# EAGLE board SparkFun_DataLogger_IoT-Panel (EAGLE 9.6.2), part 1 of 4
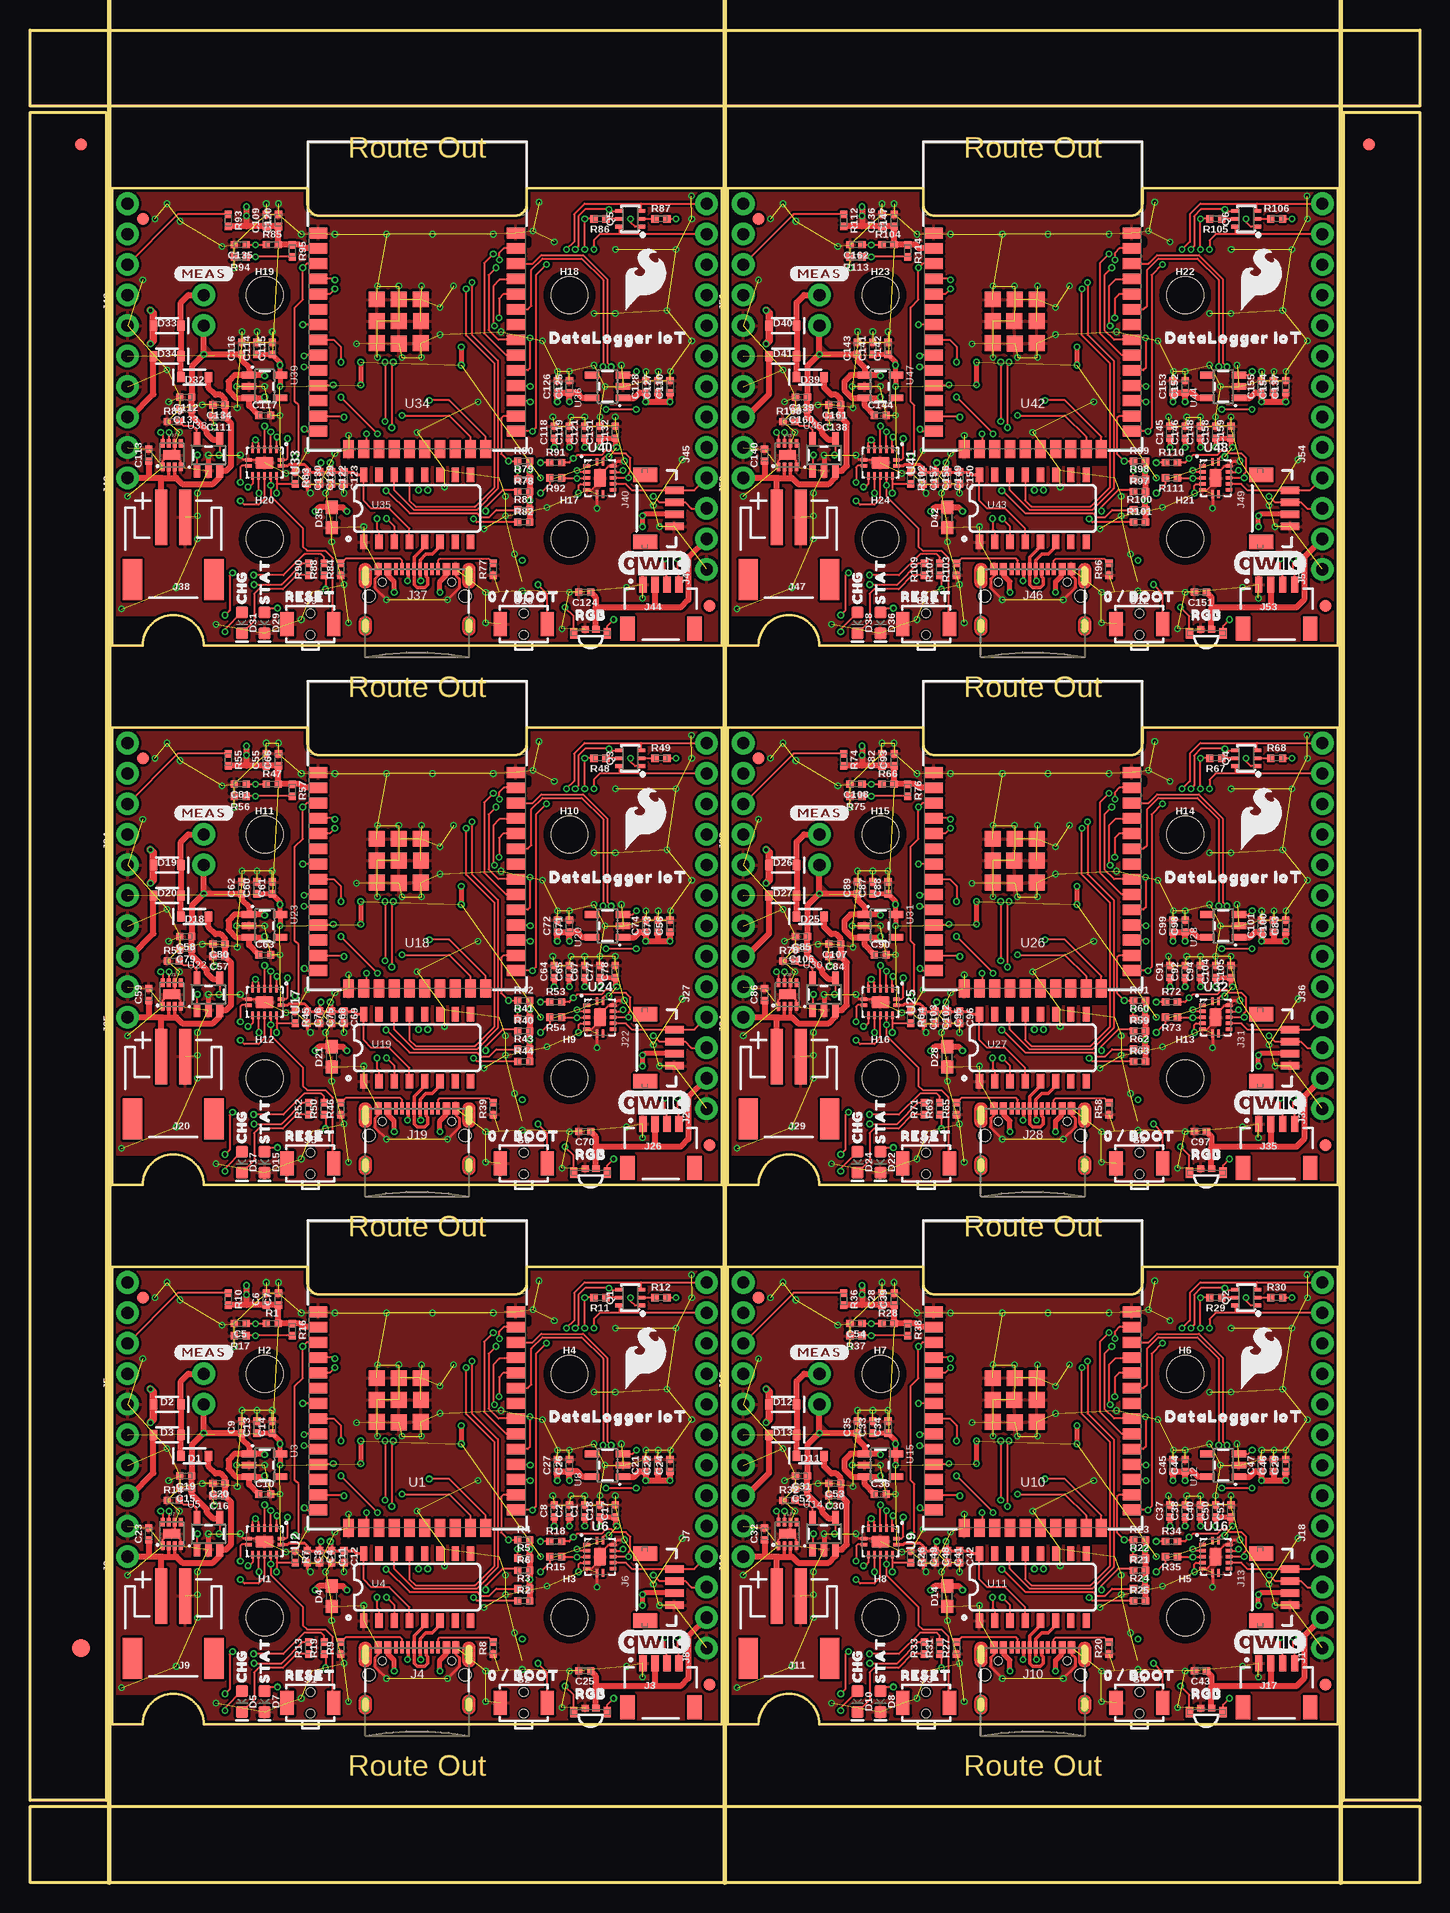
[diagram p0: board, top side]
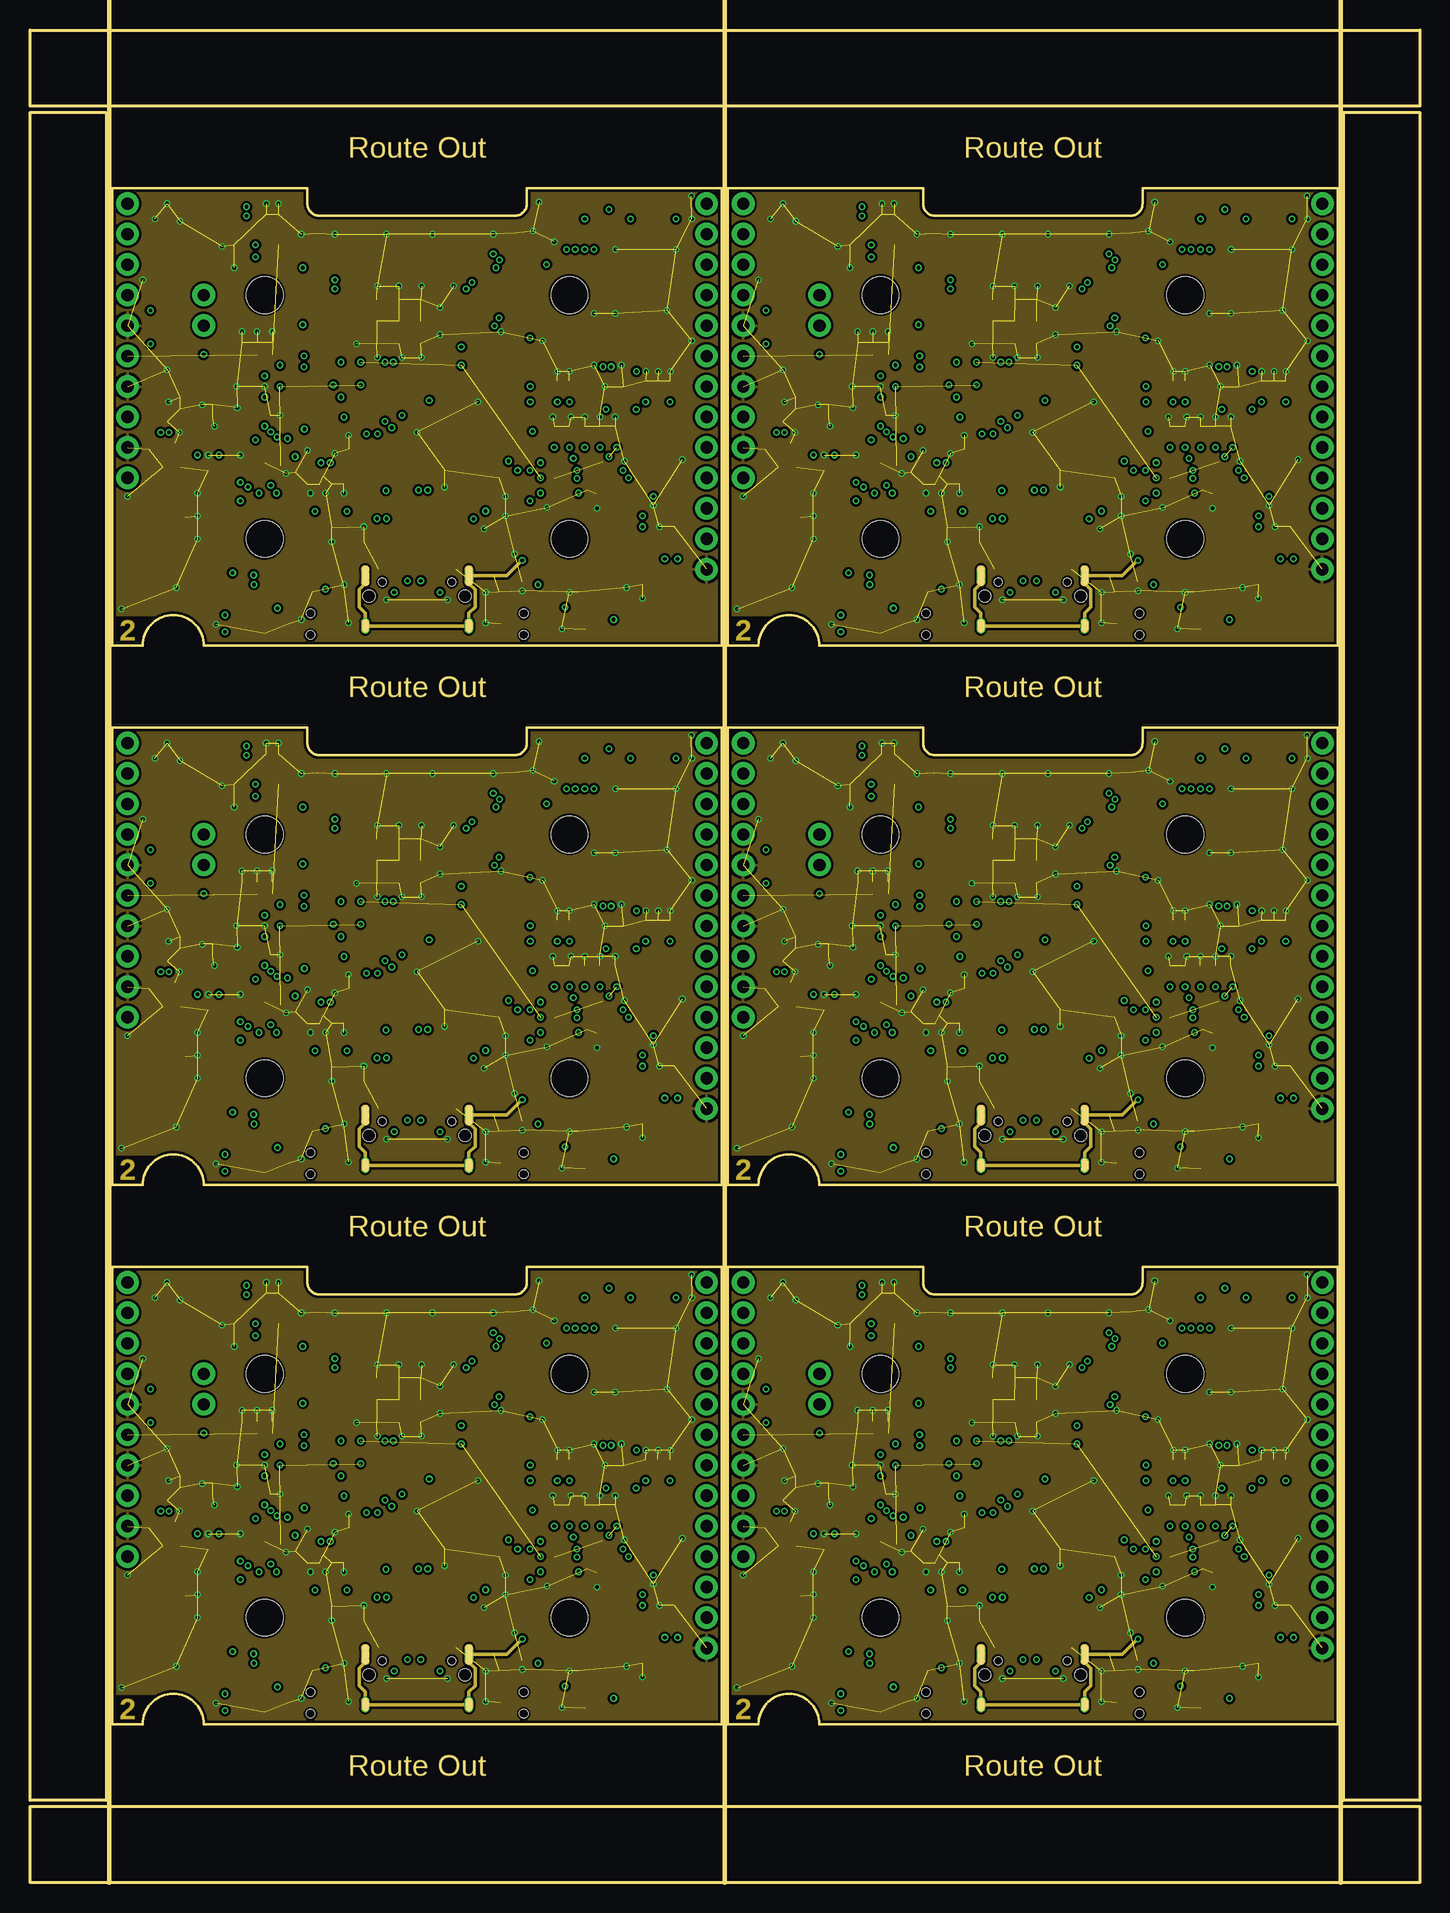
[diagram p1: board, inner layer Route2]
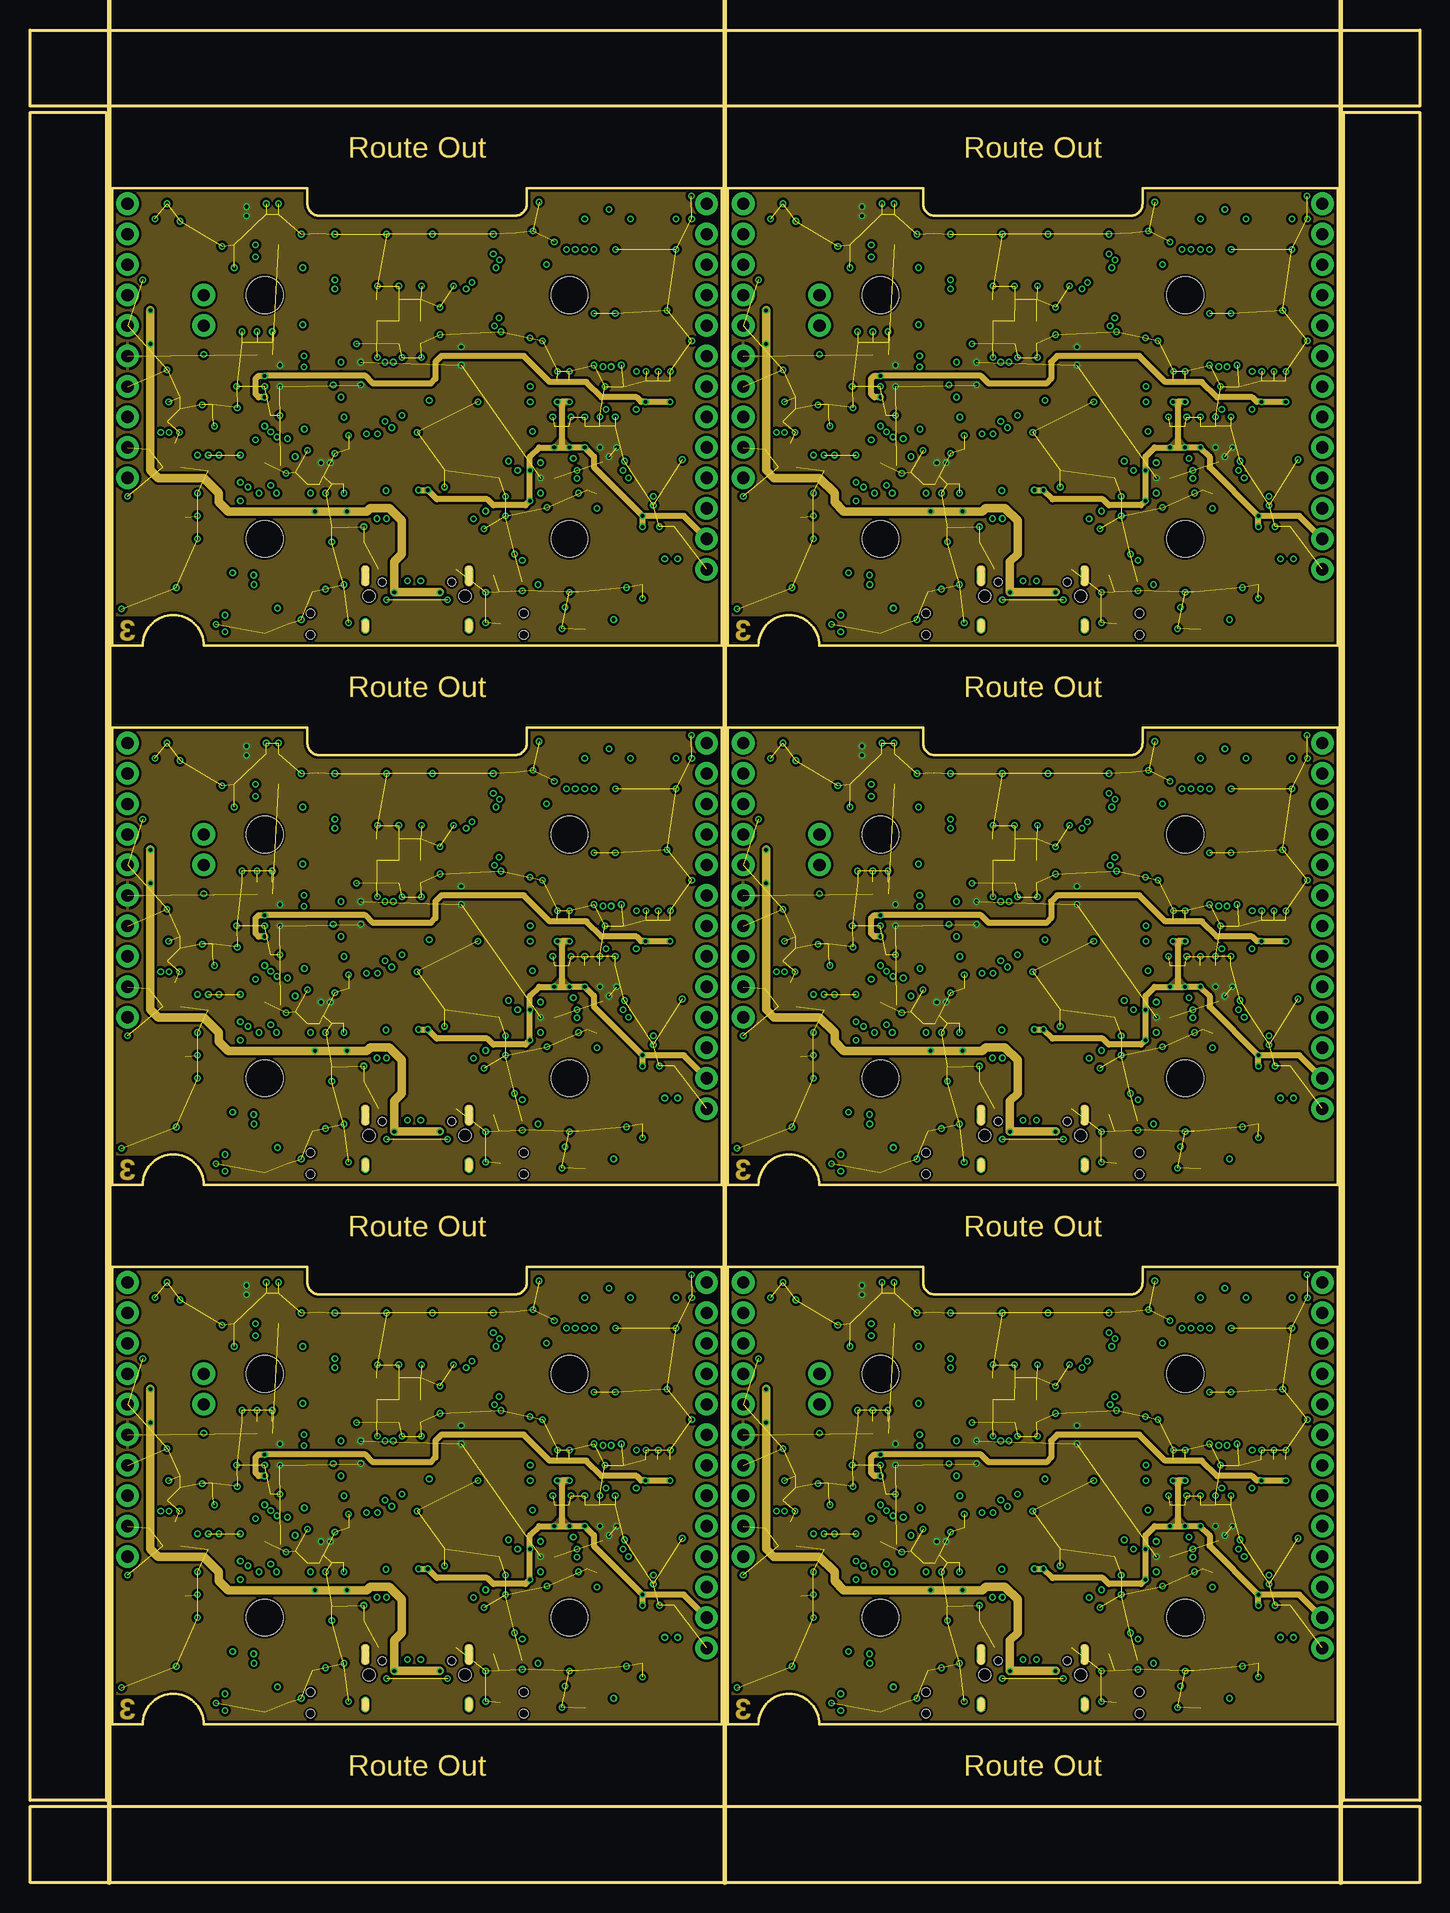
[diagram p2: board, inner layer Route15]
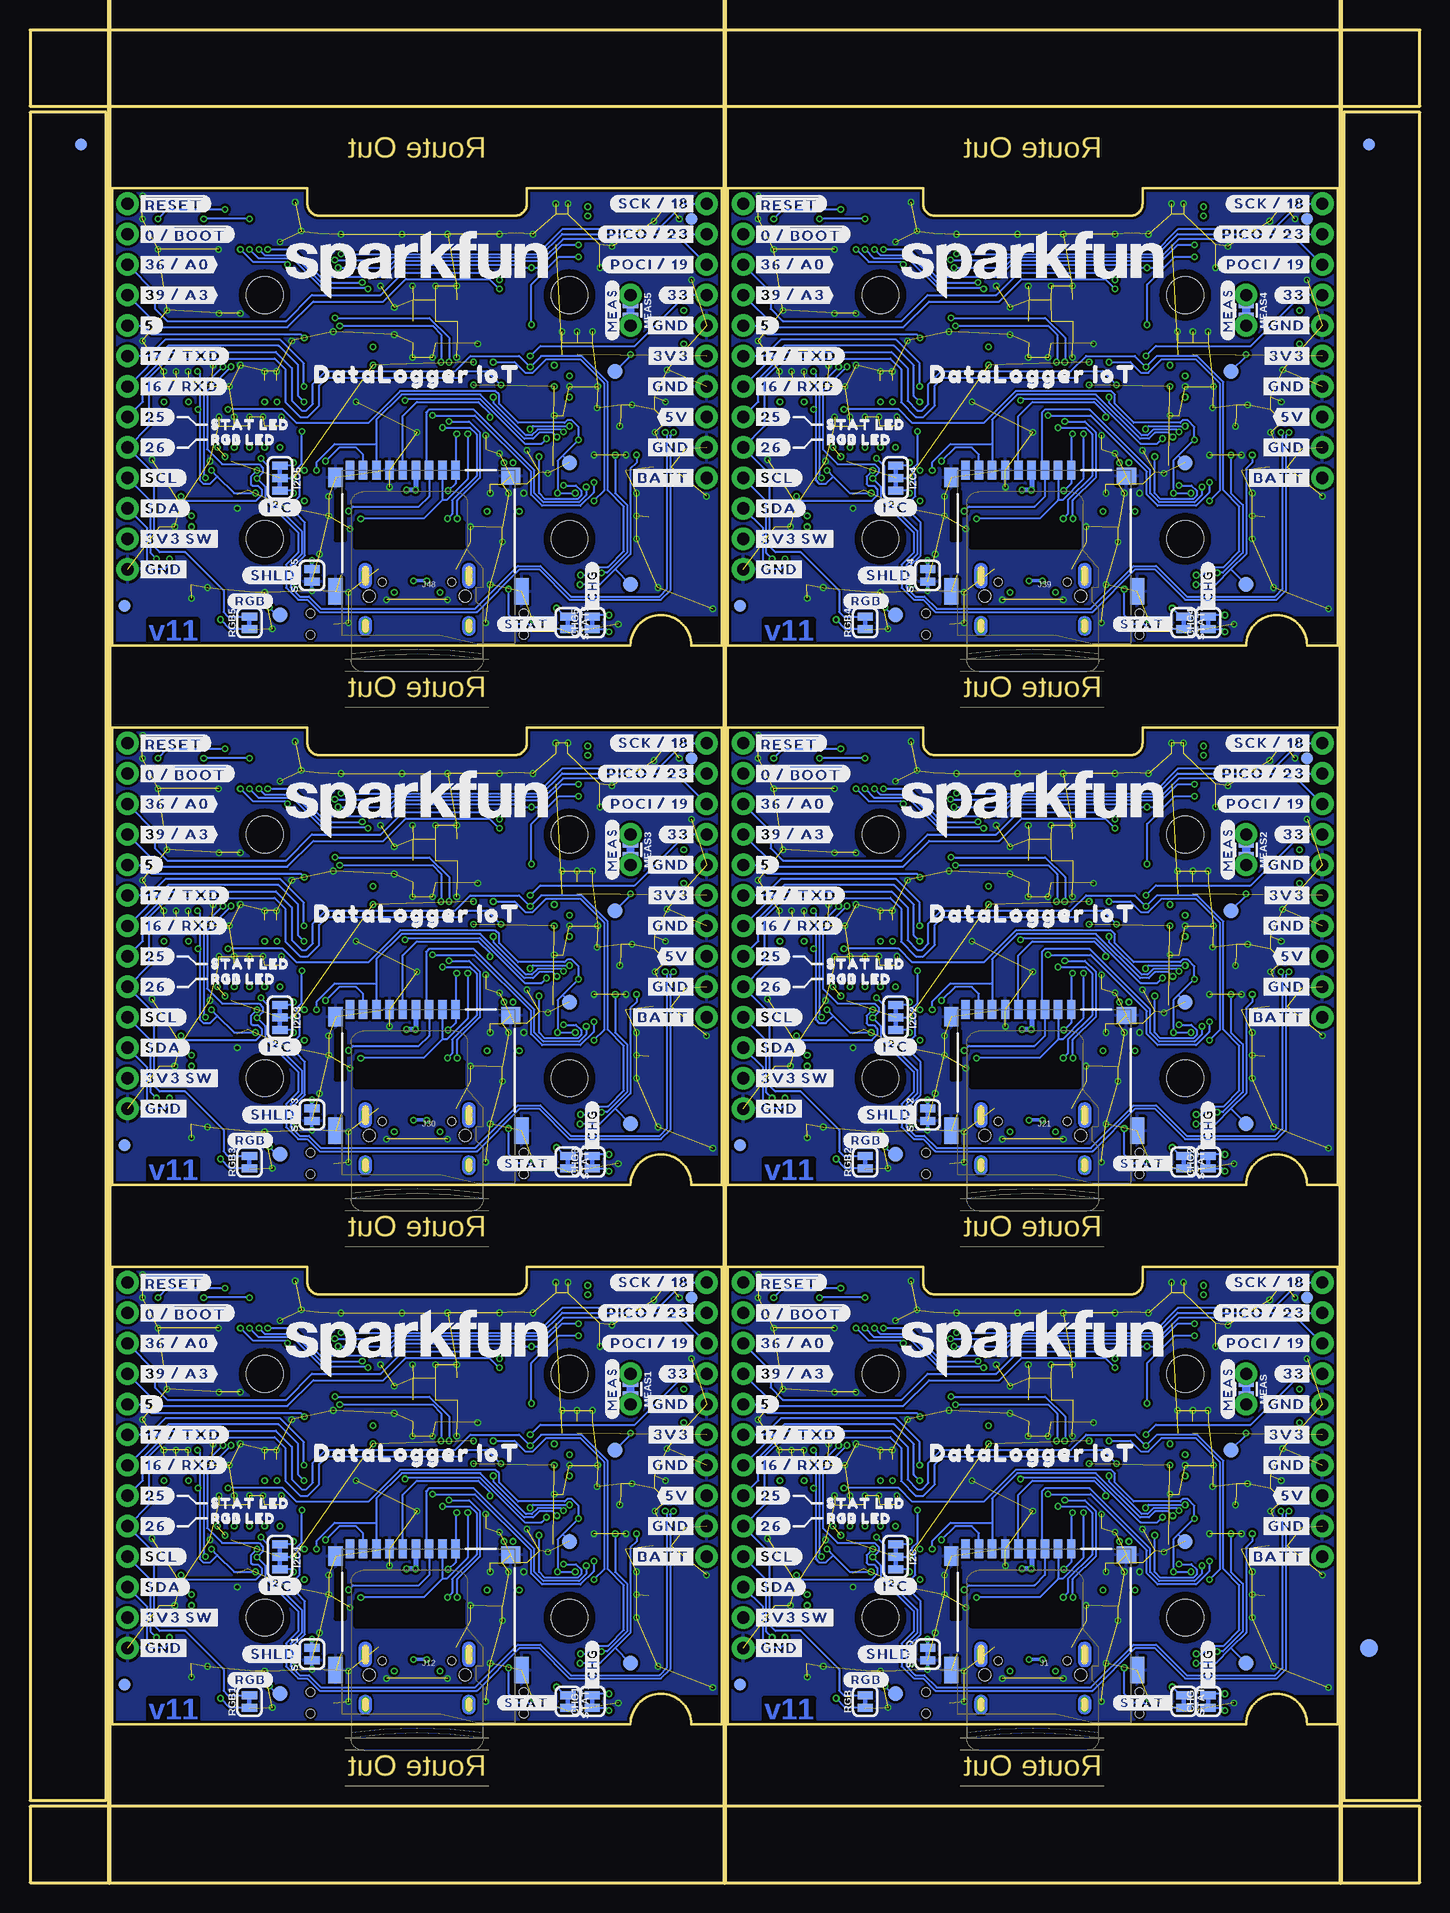
[diagram p3: board, bottom side, seen from below]

Size 115.82 x 154.43 mm. Coordinates in mm from the lower left corner, seen from the top.
Outline: 6.86,13.21 9.4,13.21 arc-90 11.94,15.75 arc-90 14.48,13.21 57.66,13.21 57.66,51.31 41.4,51.31 41.4,50.04 arc-90 40.39,49.02 24.13,49.02 arc-90 23.11,50.04 23.11,51.31 6.86,51.31 6.86,13.21
Outline: 58.17,13.21 60.71,13.21 arc-90 63.25,15.75 arc-90 65.79,13.21 108.97,13.21 108.97,51.31 92.71,51.31 92.71,50.04 arc-90 91.69,49.02 75.44,49.02 arc-90 74.42,50.04 74.42,51.31 58.17,51.31 58.17,13.21
Outline: 6.86,58.17 9.4,58.17 arc-90 11.94,60.71 arc-90 14.48,58.17 57.66,58.17 57.66,96.27 41.4,96.27 41.4,95 arc-90 40.39,93.98 24.13,93.98 arc-90 23.11,95 23.11,96.27 6.86,96.27 6.86,58.17
Outline: 58.17,58.17 60.71,58.17 arc-90 63.25,60.71 arc-90 65.79,58.17 108.97,58.17 108.97,96.27 92.71,96.27 92.71,95 arc-90 91.69,93.98 75.44,93.98 arc-90 74.42,95 74.42,96.27 58.17,96.27 58.17,58.17
Outline: 6.86,103.12 9.4,103.12 arc-90 11.94,105.66 arc-90 14.48,103.12 57.66,103.12 57.66,141.22 41.4,141.22 41.4,139.95 arc-90 40.39,138.94 24.13,138.94 arc-90 23.11,139.95 23.11,141.22 6.86,141.22 6.86,103.12
Outline: 58.17,103.12 60.71,103.12 arc-90 63.25,105.66 arc-90 65.79,103.12 108.97,103.12 108.97,141.22 92.71,141.22 92.71,139.95 arc-90 91.69,138.94 75.44,138.94 arc-90 74.42,139.95 74.42,141.22 58.17,141.22 58.17,103.12
Outline: 0,6.35 115.82,6.35 115.82,0 0,0 0,6.35
Outline: 109.47,147.57 115.82,147.57 115.82,6.86 109.47,6.86 109.47,147.57
Outline: 0,154.43 115.82,154.43 115.82,148.08 0,148.08 0,154.43
Outline: 0,147.57 6.35,147.57 6.35,6.86 0,6.86 0,147.57
Copper layers (1*2*15*16): Top 0.035559375mm / dielectric 0.47751875mm / Route2 0.035559375mm / dielectric 0.47751875mm / Route15 0.035559375mm / dielectric 0.47751875mm / Bottom 0.035559375mm
Design rules "SparkFun_DataLogger_IoT": minimum track width 5mil, minimum drill 0.2mm, track to track 5mil, track to pad 5mil, pad to pad 5mil, via to via 5mil, smd to smd 5mil, copper to edge 7mil, drill to drill 7mil, minimum pad ring 5mil, minimum via ring 5mil, stop-mask expansion 2.5mil, vias tented up to drill 25mil, thermal gap 10mil
tRestrict: area 46,13.7 to 46.5,14; area 97.3,13.7 to 97.8,14; area 46,58.7 to 46.5,58.9; area 97.3,58.7 to 97.8,58.9; area 46,103.6 to 46.5,103.9; area 97.3,103.6 to 97.8,103.9; 12 lines
Milling: 3 lines

## Footprints (pad centres in the part's own frame; a part is rotated, then mirrored left to right if it is on the bottom)
0402-TIGHT = smd 0.6 x 0.6: 1 -0.5,0; 2 0.5,0
SMT-JUMPER_2_NC_TRACE_SILK = smd 0.66 x 1.27: 1 -0.521,0; 2 0.521,0
SOD-323 = smd 0.63 x 0.83: A 1.15,0; C -1.15,0
0603 = smd 1.1 x 1: 1 -0.85,0; 2 0.85,0
LED-0603 = smd 1 x 1: A -0.877,0; C 0.877,0
B3DQ3BRG = smd 0.55 x 0.6: 1 -0.325,-0.45; 2 -0.325,0.45 | smd 0.9 x 0.6: 3 0,1.4; 4 0,-1.4
FIDUCIAL-1X2 = smd 1 x 1: 1 0,0
FIDUCIAL-1.5X3 = smd 1.5 x 1.5: 1 0,0
STAND-OFF-TIGHT = hole 3.048: 0,0
SMT-JUMPER_3_2-NC_TRACE_SILK = smd 0.66 x 1.27: 1 -1.041,0; 2 0,0; 3 1.041,0
MICROSD-EXTERNALPIN = smd 0.7 x 1.6: 1 2.25,10.5; 2 1.15,10.5; 3 0.05,10.5; 4 -1.05,10.5; 5 -2.15,10.5; 6 -3.25,10.5; 7 -4.35,10.5; 8 -5.45,10.5; 9 -6.55,10.5 | smd 1.2 x 1.6: 10 -7.75,9.9 | smd 1.2 x 2.2: 11 -7.75,0.4; 12 7.75,0.4 | smd 1.6 x 1.4: 13 6.85,10 | hole 1: 3.05,0; -4.95,0
1X06_NO_SILK = drill 1.016 pad 1.88: 1 0,0; 2 2.54,0; 3 5.08,0; 4 7.62,0; 5 10.16,0; 6 12.7,0
JST04_1MM_RA = smd 0.6 x 1.35: 1 -1.5,0; 2 -0.5,0; 3 0.5,0; 4 1.5,0 | smd 1.2 x 2: NC1 2.8,-3.675; NC2 -2.8,-3.675
USB-C-16P_4LAYER-PADS = smd 0.3 x 1: A5 -1.25,-0.34; A6 -0.25,-0.34; A7 0.25,-0.34; A8 1.25,-0.34; B5 1.75,-0.34; B6 0.75,-0.34; B7 -0.75,-0.34; B8 -1.75,-0.34 | smd 0.6 x 1: GND -3.225,-0.34; GND2 3.225,-0.34; VBUS1 -2.45,-0.34; VBUS2 2.45,-0.34 | drill 0.4 pad 0.6 long: SHLD1 -4.318,-0.915; SHLD2 4.318,-0.915; SHLD3 -4.318,-5.095; SHLD4 4.318,-5.095 | hole 0.65: -2.89,-1.445; 2.89,-1.445
1X04_NO_SILK = drill 1.016 pad 1.88: 1 0,0; 2 2.54,0; 3 5.08,0; 4 7.62,0
JST04_1MM_VERT = smd 0.6 x 1.55: 1 -1.5,0.775; 2 -0.5,0.775; 3 0.5,0.775; 4 1.5,0.775 | smd 1.2 x 2: NC1 -2.8,3.2; NC2 2.8,3.2
1X09_NO_SILK = drill 1.016 pad 1.88: 1 0,0; 2 2.54,0; 3 5.08,0; 4 7.62,0; 5 10.16,0; 6 12.7,0; 7 15.24,0; 8 17.78,0; 9 20.32,0
JST-2-SMD = smd 1 x 4.6: 1 -1,-3.7; 2 1,-3.7 | smd 1.6 x 3.4: NC1 -3.4,1.5; NC2 3.4,1.5
COMBO-JUMPER_2_NC_TRACE = smd 0.635 x 1.27: 1 -0.508,0; 2 0.508,0 | drill 1.016 pad 1.88: 3 -1.27,0; 4 1.27,0
SC70-6 = smd 0.3 x 0.66: 1 -0.65,-0.92; 2 0,-0.92; 3 0.65,-0.92; 4 0.65,0.92; 5 0,0.92; 6 -0.65,0.92
TACTILE_SWITCH_SMD_RIGHT_ANGLE = smd 1.1 x 2: 1 -1.95,0; 2 1.95,0 | hole 0.7: 0,0.9; 0,-0.9
PAD.03X.05 = smd 1.27 x 1.27: 1 0,0
ESP-WROOM-32D-NARROW = smd 0.9 x 1.5: 1 6.43,8.238; 2 5.16,8.238; 3 3.89,8.238; 4 2.62,8.238; 5 1.35,8.238; 6 0.08,8.238; 7 -1.19,8.238; 8 -2.46,8.238; 9 -3.73,8.238; 10 -5,8.238; 11 -6.27,8.238; 12 -7.54,8.238; 13 -8.81,8.238; 14 -10.08,8.238; 25 -10.08,-8.238; 26 -8.81,-8.238; 27 -7.54,-8.238; 28 -6.27,-8.238; 29 -5,-8.238; 30 -3.73,-8.238; 31 -2.46,-8.238; 32 -1.19,-8.238; 33 0.08,-8.238; 34 1.35,-8.238; 35 2.62,-8.238; 36 3.89,-8.238; 37 5.16,-8.238; 38 6.43,-8.238 | smd 1.5 x 0.9: 15 -11.57,5.715; 16 -11.57,4.445; 17 -11.57,3.175; 18 -11.57,1.905; 19 -11.57,0.635; 20 -11.57,-0.635; 21 -11.57,-1.905; 22 -11.57,-3.175; 23 -11.57,-4.445; 24 -11.57,-5.715 | smd 1.33 x 1.33: GND1 -0.912,1.531; GNDT1 -2.751,3.346; GNDT2 -2.761,1.516; GNDT3 -2.751,-0.314; GNDT4 -0.891,-0.324; GNDT5 0.909,-0.314; GNDT6 0.909,1.516; GNDT7 0.909,3.346; GNDT8 -0.921,3.346
14-QFN = smd 0.25 x 0.6: 1 -0.25,1.35; 7 -0.25,-1.35; 8 0.25,-1.35; 14 0.25,1.35 | smd 0.6 x 0.25: 2 -1.1,1; 3 -1.1,0.5; 4 -1.1,0; 5 -1.1,-0.5; 6 -1.1,-1; 9 1.1,-1; 10 1.1,-0.5; 11 1.1,0; 12 1.1,0.5; 13 1.1,1 | smd 1 x 1.5: EPAD 0,0
SOT23-5 = smd 0.55 x 1.2: 1 -0.95,-1.3; 2 0,-1.3; 3 0.95,-1.3; 4 0.95,1.3; 5 -0.95,1.3
SO016 = smd 0.6 x 1.2: 1 -4.445,-2.8; 2 -3.175,-2.8; 3 -1.905,-2.8; 4 -0.635,-2.8; 5 0.635,-2.8; 6 1.905,-2.8; 7 3.175,-2.8; 8 4.445,-2.8; 9 4.445,2.8; 10 3.175,2.8; 11 1.905,2.8; 12 0.635,2.8; 13 -0.635,2.8; 14 -1.905,2.8; 15 -3.175,2.8; 16 -4.445,2.8
DFN-8 = smd 0.3 x 0.7: 1 -0.75,-0.99; 2 -0.25,-0.99; 3 0.25,-0.99; 4 0.75,-0.99; 5 0.75,0.99; 6 0.25,0.99; 7 -0.25,0.99; 8 -0.75,0.99 | smd 1.38 x 0.8: 9 0,0

## Placement (x,y rotation side)
C1  2.2uF  [0402-TIGHT]  46.23,30.99 90 top
C2  0.1uF  [0402-TIGHT]  44.96,30.99 90 top
C3  2.2uF  [0402-TIGHT]  23.11,27.18 270 top
C4  2.2uF  [0402-TIGHT]  24.13,27.18 270 top
C5  0.1uF  [0402-TIGHT]  17.53,46.61 180 top
C6  2.2uF  [0402-TIGHT]  19.68,48.64 90 top
C7  0.1uF  [0402-TIGHT]  20.7,48.64 90 top
C8  2.2uF  [0402-TIGHT]  43.69,30.99 90 top
C9  2.2uF  [0402-TIGHT]  17.65,37.97 90 top
C10  0.1uF  [0402-TIGHT]  19.56,32.38 0 top
C11  2.2uF  [0402-TIGHT]  25.15,27.18 270 top
C12  10nF  [0402-TIGHT]  26.16,27.18 270 top
C13  2.2uF  [0402-TIGHT]  18.92,37.97 90 top
C14  0.1uF  [0402-TIGHT]  20.19,37.97 90 top
C15  2.2uF  [0402-TIGHT]  12.98,32.89 180 top
C16  2.2uF  [0402-TIGHT]  15.75,32.26 180 top
C17  2.2uF  [0402-TIGHT]  48.77,30.99 90 top
C18  2.2uF  [0402-TIGHT]  47.5,30.99 90 top
C19  2.2uF  [0402-TIGHT]  12.98,33.91 180 top
C20  2.2uF  [0402-TIGHT]  15.75,33.27 180 top
C21  2.2uF  [0402-TIGHT]  51.31,34.8 90 top
C22  2.2uF  [0402-TIGHT]  52.32,34.8 90 top
C23  0.1uF  [0402-TIGHT]  9.91,29.08 90 top
C24  2.2uF  [0402-TIGHT]  53.34,34.8 90 top
C25  2.2uF  [0402-TIGHT]  46.23,17.65 180 top
C26  2.2uF  [0402-TIGHT]  44.96,34.8 90 top
C27  0.1uF  [0402-TIGHT]  43.94,34.8 90 top
C28  2.2uF  [0402-TIGHT]  70.99,48.64 90 top
C29  2.2uF  [0402-TIGHT]  104.65,34.8 90 top
C30  2.2uF  [0402-TIGHT]  67.06,32.26 180 top
C31  2.2uF  [0402-TIGHT]  64.29,33.91 180 top
C32  0.1uF  [0402-TIGHT]  61.21,29.08 90 top
C33  2.2uF  [0402-TIGHT]  70.23,37.97 90 top
C34  0.1uF  [0402-TIGHT]  71.5,37.97 90 top
C35  2.2uF  [0402-TIGHT]  68.96,37.97 90 top
C36  0.1uF  [0402-TIGHT]  70.87,32.38 0 top
C37  2.2uF  [0402-TIGHT]  95,30.99 90 top
C38  0.1uF  [0402-TIGHT]  96.27,30.99 90 top
C39  0.1uF  [0402-TIGHT]  72.01,48.64 90 top
C40  2.2uF  [0402-TIGHT]  97.54,30.99 90 top
C41  2.2uF  [0402-TIGHT]  76.45,27.18 270 top
C42  10nF  [0402-TIGHT]  77.47,27.18 270 top
C43  2.2uF  [0402-TIGHT]  97.54,17.65 180 top
C44  2.2uF  [0402-TIGHT]  96.27,34.8 90 top
C45  0.1uF  [0402-TIGHT]  95.25,34.8 90 top
C46  2.2uF  [0402-TIGHT]  103.63,34.8 90 top
C47  2.2uF  [0402-TIGHT]  102.62,34.8 90 top
C48  2.2uF  [0402-TIGHT]  75.44,27.18 270 top
C49  2.2uF  [0402-TIGHT]  74.42,27.18 270 top
C50  2.2uF  [0402-TIGHT]  98.81,30.99 90 top
C51  2.2uF  [0402-TIGHT]  100.08,30.99 90 top
C52  2.2uF  [0402-TIGHT]  64.29,32.89 180 top
C53  2.2uF  [0402-TIGHT]  67.06,33.27 180 top
C54  0.1uF  [0402-TIGHT]  68.83,46.61 180 top
C55  2.2uF  [0402-TIGHT]  19.68,93.6 90 top
C56  2.2uF  [0402-TIGHT]  53.34,79.76 90 top
C57  2.2uF  [0402-TIGHT]  15.75,77.22 180 top
C58  2.2uF  [0402-TIGHT]  12.98,78.87 180 top
C59  0.1uF  [0402-TIGHT]  9.91,74.04 90 top
C60  2.2uF  [0402-TIGHT]  18.92,82.93 90 top
C61  0.1uF  [0402-TIGHT]  20.19,82.93 90 top
C62  2.2uF  [0402-TIGHT]  17.65,82.93 90 top
C63  0.1uF  [0402-TIGHT]  19.56,77.34 0 top
C64  2.2uF  [0402-TIGHT]  43.69,75.95 90 top
C65  0.1uF  [0402-TIGHT]  44.96,75.95 90 top
C66  0.1uF  [0402-TIGHT]  20.7,93.6 90 top
C67  2.2uF  [0402-TIGHT]  46.23,75.95 90 top
C68  2.2uF  [0402-TIGHT]  25.15,72.14 270 top
C69  10nF  [0402-TIGHT]  26.16,72.14 270 top
C70  2.2uF  [0402-TIGHT]  46.23,62.61 180 top
C71  2.2uF  [0402-TIGHT]  44.96,79.76 90 top
C72  0.1uF  [0402-TIGHT]  43.94,79.76 90 top
C73  2.2uF  [0402-TIGHT]  52.32,79.76 90 top
C74  2.2uF  [0402-TIGHT]  51.31,79.76 90 top
C75  2.2uF  [0402-TIGHT]  24.13,72.14 270 top
C76  2.2uF  [0402-TIGHT]  23.11,72.14 270 top
C77  2.2uF  [0402-TIGHT]  47.5,75.95 90 top
C78  2.2uF  [0402-TIGHT]  48.77,75.95 90 top
C79  2.2uF  [0402-TIGHT]  12.98,77.85 180 top
C80  2.2uF  [0402-TIGHT]  15.75,78.23 180 top
C81  0.1uF  [0402-TIGHT]  17.53,91.57 180 top
C82  2.2uF  [0402-TIGHT]  70.99,93.6 90 top
C83  2.2uF  [0402-TIGHT]  104.65,79.76 90 top
C84  2.2uF  [0402-TIGHT]  67.06,77.22 180 top
C85  2.2uF  [0402-TIGHT]  64.29,78.87 180 top
C86  0.1uF  [0402-TIGHT]  61.21,74.04 90 top
C87  2.2uF  [0402-TIGHT]  70.23,82.93 90 top
C88  0.1uF  [0402-TIGHT]  71.5,82.93 90 top
C89  2.2uF  [0402-TIGHT]  68.96,82.93 90 top
C90  0.1uF  [0402-TIGHT]  70.87,77.34 0 top
C91  2.2uF  [0402-TIGHT]  95,75.95 90 top
C92  0.1uF  [0402-TIGHT]  96.27,75.95 90 top
C93  0.1uF  [0402-TIGHT]  72.01,93.6 90 top
C94  2.2uF  [0402-TIGHT]  97.54,75.95 90 top
C95  2.2uF  [0402-TIGHT]  76.45,72.14 270 top
C96  10nF  [0402-TIGHT]  77.47,72.14 270 top
C97  2.2uF  [0402-TIGHT]  97.54,62.61 180 top
C98  2.2uF  [0402-TIGHT]  96.27,79.76 90 top
C99  0.1uF  [0402-TIGHT]  95.25,79.76 90 top
C100  2.2uF  [0402-TIGHT]  103.63,79.76 90 top
C101  2.2uF  [0402-TIGHT]  102.62,79.76 90 top
C102  2.2uF  [0402-TIGHT]  75.44,72.14 270 top
C103  2.2uF  [0402-TIGHT]  74.42,72.14 270 top
C104  2.2uF  [0402-TIGHT]  98.81,75.95 90 top
C105  2.2uF  [0402-TIGHT]  100.08,75.95 90 top
C106  2.2uF  [0402-TIGHT]  64.29,77.85 180 top
C107  2.2uF  [0402-TIGHT]  67.06,78.23 180 top
C108  0.1uF  [0402-TIGHT]  68.83,91.57 180 top
C109  2.2uF  [0402-TIGHT]  19.68,138.56 90 top
C110  2.2uF  [0402-TIGHT]  53.34,124.71 90 top
C111  2.2uF  [0402-TIGHT]  15.75,122.17 180 top
C112  2.2uF  [0402-TIGHT]  12.98,123.83 180 top
C113  0.1uF  [0402-TIGHT]  9.91,119 90 top
C114  2.2uF  [0402-TIGHT]  18.92,127.89 90 top
C115  0.1uF  [0402-TIGHT]  20.19,127.89 90 top
C116  2.2uF  [0402-TIGHT]  17.65,127.89 90 top
C117  0.1uF  [0402-TIGHT]  19.56,122.3 0 top
C118  2.2uF  [0402-TIGHT]  43.69,120.9 90 top
C119  0.1uF  [0402-TIGHT]  44.96,120.9 90 top
C120  0.1uF  [0402-TIGHT]  20.7,138.56 90 top
C121  2.2uF  [0402-TIGHT]  46.23,120.9 90 top
C122  2.2uF  [0402-TIGHT]  25.15,117.09 270 top
C123  10nF  [0402-TIGHT]  26.16,117.09 270 top
C124  2.2uF  [0402-TIGHT]  46.23,107.57 180 top
C125  2.2uF  [0402-TIGHT]  44.96,124.71 90 top
C126  0.1uF  [0402-TIGHT]  43.94,124.71 90 top
C127  2.2uF  [0402-TIGHT]  52.32,124.71 90 top
C128  2.2uF  [0402-TIGHT]  51.31,124.71 90 top
C129  2.2uF  [0402-TIGHT]  24.13,117.09 270 top
C130  2.2uF  [0402-TIGHT]  23.11,117.09 270 top
C131  2.2uF  [0402-TIGHT]  47.5,120.9 90 top
C132  2.2uF  [0402-TIGHT]  48.77,120.9 90 top
C133  2.2uF  [0402-TIGHT]  12.98,122.81 180 top
C134  2.2uF  [0402-TIGHT]  15.75,123.19 180 top
C135  0.1uF  [0402-TIGHT]  17.53,136.53 180 top
C136  2.2uF  [0402-TIGHT]  70.99,138.56 90 top
C137  2.2uF  [0402-TIGHT]  104.65,124.71 90 top
C138  2.2uF  [0402-TIGHT]  67.06,122.17 180 top
C139  2.2uF  [0402-TIGHT]  64.29,123.83 180 top
C140  0.1uF  [0402-TIGHT]  61.21,119 90 top
C141  2.2uF  [0402-TIGHT]  70.23,127.89 90 top
C142  0.1uF  [0402-TIGHT]  71.5,127.89 90 top
C143  2.2uF  [0402-TIGHT]  68.96,127.89 90 top
C144  0.1uF  [0402-TIGHT]  70.87,122.3 0 top
C145  2.2uF  [0402-TIGHT]  95,120.9 90 top
C146  0.1uF  [0402-TIGHT]  96.27,120.9 90 top
C147  0.1uF  [0402-TIGHT]  72.01,138.56 90 top
C148  2.2uF  [0402-TIGHT]  97.54,120.9 90 top
C149  2.2uF  [0402-TIGHT]  76.45,117.09 270 top
C150  10nF  [0402-TIGHT]  77.47,117.09 270 top
C151  2.2uF  [0402-TIGHT]  97.54,107.57 180 top
C152  2.2uF  [0402-TIGHT]  96.27,124.71 90 top
C153  0.1uF  [0402-TIGHT]  95.25,124.71 90 top
C154  2.2uF  [0402-TIGHT]  103.63,124.71 90 top
C155  2.2uF  [0402-TIGHT]  102.62,124.71 90 top
C156  2.2uF  [0402-TIGHT]  75.44,117.09 270 top
C157  2.2uF  [0402-TIGHT]  74.42,117.09 270 top
C158  2.2uF  [0402-TIGHT]  98.81,120.9 90 top
C159  2.2uF  [0402-TIGHT]  100.08,120.9 90 top
C160  2.2uF  [0402-TIGHT]  64.29,122.81 180 top
C161  2.2uF  [0402-TIGHT]  67.06,123.19 180 top
C162  0.1uF  [0402-TIGHT]  68.83,136.53 180 top
CHG  JUMPER-SMT_2_NC_TRACE_SILK  [SMT-JUMPER_2_NC_TRACE_SILK]  17.65,15.11 90 bottom
CHG1  JUMPER-SMT_2_NC_TRACE_SILK  [SMT-JUMPER_2_NC_TRACE_SILK]  68.96,15.11 90 bottom
CHG2  JUMPER-SMT_2_NC_TRACE_SILK  [SMT-JUMPER_2_NC_TRACE_SILK]  17.65,60.07 90 bottom
CHG3  JUMPER-SMT_2_NC_TRACE_SILK  [SMT-JUMPER_2_NC_TRACE_SILK]  68.96,60.07 90 bottom
CHG4  JUMPER-SMT_2_NC_TRACE_SILK  [SMT-JUMPER_2_NC_TRACE_SILK]  17.65,105.03 90 bottom
CHG5  JUMPER-SMT_2_NC_TRACE_SILK  [SMT-JUMPER_2_NC_TRACE_SILK]  68.96,105.03 90 bottom
D1  3A/10V/280mV  [SOD-323]  13.72,35.56 0 top
D2  3A/10V/280mV  [SOD-323]  11.43,39.88 180 top
D3  3A/10V/280mV  [SOD-323]  11.43,37.34 180 top
D4  TVS  [0603]  25.15,23.88 90 top
D5  Yellow  [LED-0603]  17.65,15.11 270 top
D6  B3DQ3BRG  [B3DQ3BRG]  46.71,14.22 270 top
D7  BLUE  [LED-0603]  19.56,15.11 270 top
D8  BLUE  [LED-0603]  70.87,15.11 270 top
D9  B3DQ3BRG  [B3DQ3BRG]  98.02,14.22 270 top
D10  Yellow  [LED-0603]  68.96,15.11 270 top
D11  3A/10V/280mV  [SOD-323]  65.02,35.56 0 top
D12  3A/10V/280mV  [SOD-323]  62.74,39.88 180 top
D13  3A/10V/280mV  [SOD-323]  62.74,37.34 180 top
D14  TVS  [0603]  76.45,23.88 90 top
D15  BLUE  [LED-0603]  19.56,60.07 270 top
D16  B3DQ3BRG  [B3DQ3BRG]  46.71,59.18 270 top
D17  Yellow  [LED-0603]  17.65,60.07 270 top
D18  3A/10V/280mV  [SOD-323]  13.72,80.52 0 top
D19  3A/10V/280mV  [SOD-323]  11.43,84.84 180 top
D20  3A/10V/280mV  [SOD-323]  11.43,82.3 180 top
D21  TVS  [0603]  25.15,68.83 90 top
D22  BLUE  [LED-0603]  70.87,60.07 270 top
D23  B3DQ3BRG  [B3DQ3BRG]  98.02,59.18 270 top
D24  Yellow  [LED-0603]  68.96,60.07 270 top
D25  3A/10V/280mV  [SOD-323]  65.02,80.52 0 top
D26  3A/10V/280mV  [SOD-323]  62.74,84.84 180 top
D27  3A/10V/280mV  [SOD-323]  62.74,82.3 180 top
D28  TVS  [0603]  76.45,68.83 90 top
D29  BLUE  [LED-0603]  19.56,105.03 270 top
D30  B3DQ3BRG  [B3DQ3BRG]  46.71,104.14 270 top
D31  Yellow  [LED-0603]  17.65,105.03 270 top
D32  3A/10V/280mV  [SOD-323]  13.72,125.48 0 top
D33  3A/10V/280mV  [SOD-323]  11.43,129.79 180 top
D34  3A/10V/280mV  [SOD-323]  11.43,127.25 180 top
D35  TVS  [0603]  25.15,113.79 90 top
D36  BLUE  [LED-0603]  70.87,105.03 270 top
D37  B3DQ3BRG  [B3DQ3BRG]  98.02,104.14 270 top
D38  Yellow  [LED-0603]  68.96,105.03 270 top
D39  3A/10V/280mV  [SOD-323]  65.02,125.48 0 top
D40  3A/10V/280mV  [SOD-323]  62.74,129.79 180 top
D41  3A/10V/280mV  [SOD-323]  62.74,127.25 180 top
D42  TVS  [0603]  76.45,113.79 90 top
E$1  [FIDUCIAL-1X2]  4.23,144.91 0 top
E$2  [FIDUCIAL-1X2]  4.23,144.91 0 bottom
E$3  [FIDUCIAL-1X2]  111.59,144.91 0 top
E$4  [FIDUCIAL-1X2]  111.59,144.91 0 bottom
E$5  [FIDUCIAL-1.5X3]  4.23,19.56 0 top
E$6  [FIDUCIAL-1.5X3]  4.23,19.56 0 bottom
FD1  FIDUCIAL1X2  [FIDUCIAL-1X2]  56.64,16.51 0 top
FD2  FIDUCIAL1X2  [FIDUCIAL-1X2]  56.64,16.51 0 bottom
FD3  FIDUCIAL1X2  [FIDUCIAL-1X2]  9.4,48.77 0 bottom
FD4  FIDUCIAL1X2  [FIDUCIAL-1X2]  9.4,48.77 0 top
FD5  FIDUCIAL1X2  [FIDUCIAL-1X2]  60.71,48.77 0 bottom
FD6  FIDUCIAL1X2  [FIDUCIAL-1X2]  60.71,48.77 0 top
FD7  FIDUCIAL1X2  [FIDUCIAL-1X2]  107.95,16.51 0 bottom
FD8  FIDUCIAL1X2  [FIDUCIAL-1X2]  107.95,16.51 0 top
FD9  FIDUCIAL1X2  [FIDUCIAL-1X2]  9.4,93.73 0 bottom
FD10  FIDUCIAL1X2  [FIDUCIAL-1X2]  9.4,93.73 0 top
FD11  FIDUCIAL1X2  [FIDUCIAL-1X2]  56.64,61.47 0 bottom
FD12  FIDUCIAL1X2  [FIDUCIAL-1X2]  56.64,61.47 0 top
FD13  FIDUCIAL1X2  [FIDUCIAL-1X2]  60.71,93.73 0 bottom
FD14  FIDUCIAL1X2  [FIDUCIAL-1X2]  60.71,93.73 0 top
FD15  FIDUCIAL1X2  [FIDUCIAL-1X2]  107.95,61.47 0 bottom
FD16  FIDUCIAL1X2  [FIDUCIAL-1X2]  107.95,61.47 0 top
FD17  FIDUCIAL1X2  [FIDUCIAL-1X2]  9.4,138.68 0 bottom
FD18  FIDUCIAL1X2  [FIDUCIAL-1X2]  9.4,138.68 0 top
FD19  FIDUCIAL1X2  [FIDUCIAL-1X2]  56.64,106.43 0 bottom
FD20  FIDUCIAL1X2  [FIDUCIAL-1X2]  56.64,106.43 0 top
FD21  FIDUCIAL1X2  [FIDUCIAL-1X2]  60.71,138.68 0 bottom
FD22  FIDUCIAL1X2  [FIDUCIAL-1X2]  60.71,138.68 0 top
FD23  FIDUCIAL1X2  [FIDUCIAL-1X2]  107.95,106.43 0 bottom
FD24  FIDUCIAL1X2  [FIDUCIAL-1X2]  107.95,106.43 0 top
H1  STAND-OFFTIGHT  [STAND-OFF-TIGHT]  19.56,22.1 0 top
H2  STAND-OFFTIGHT  [STAND-OFF-TIGHT]  19.56,42.42 0 top
H3  STAND-OFFTIGHT  [STAND-OFF-TIGHT]  44.96,22.1 0 top
H4  STAND-OFFTIGHT  [STAND-OFF-TIGHT]  44.96,42.42 0 top
H5  STAND-OFFTIGHT  [STAND-OFF-TIGHT]  96.27,22.1 0 top
H6  STAND-OFFTIGHT  [STAND-OFF-TIGHT]  96.27,42.42 0 top
H7  STAND-OFFTIGHT  [STAND-OFF-TIGHT]  70.87,42.42 0 top
H8  STAND-OFFTIGHT  [STAND-OFF-TIGHT]  70.87,22.1 0 top
H9  STAND-OFFTIGHT  [STAND-OFF-TIGHT]  44.96,67.06 0 top
H10  STAND-OFFTIGHT  [STAND-OFF-TIGHT]  44.96,87.38 0 top
H11  STAND-OFFTIGHT  [STAND-OFF-TIGHT]  19.56,87.38 0 top
H12  STAND-OFFTIGHT  [STAND-OFF-TIGHT]  19.56,67.06 0 top
H13  STAND-OFFTIGHT  [STAND-OFF-TIGHT]  96.27,67.06 0 top
H14  STAND-OFFTIGHT  [STAND-OFF-TIGHT]  96.27,87.38 0 top
H15  STAND-OFFTIGHT  [STAND-OFF-TIGHT]  70.87,87.38 0 top
H16  STAND-OFFTIGHT  [STAND-OFF-TIGHT]  70.87,67.06 0 top
H17  STAND-OFFTIGHT  [STAND-OFF-TIGHT]  44.96,112.01 0 top
H18  STAND-OFFTIGHT  [STAND-OFF-TIGHT]  44.96,132.33 0 top
H19  STAND-OFFTIGHT  [STAND-OFF-TIGHT]  19.56,132.33 0 top
H20  STAND-OFFTIGHT  [STAND-OFF-TIGHT]  19.56,112.01 0 top
H21  STAND-OFFTIGHT  [STAND-OFF-TIGHT]  96.27,112.01 0 top
H22  STAND-OFFTIGHT  [STAND-OFF-TIGHT]  96.27,132.33 0 top
H23  STAND-OFFTIGHT  [STAND-OFF-TIGHT]  70.87,132.33 0 top
H24  STAND-OFFTIGHT  [STAND-OFF-TIGHT]  70.87,112.01 0 top
I2C  JUMPER-SMT_3_2-NC_TRACE_SILK  [SMT-JUMPER_3_2-NC_TRACE_SILK]  43.69,27.18 270 bottom
I2C1  JUMPER-SMT_3_2-NC_TRACE_SILK  [SMT-JUMPER_3_2-NC_TRACE_SILK]  95,27.18 270 bottom
I2C2  JUMPER-SMT_3_2-NC_TRACE_SILK  [SMT-JUMPER_3_2-NC_TRACE_SILK]  43.69,72.14 270 bottom
I2C3  JUMPER-SMT_3_2-NC_TRACE_SILK  [SMT-JUMPER_3_2-NC_TRACE_SILK]  95,72.14 270 bottom
I2C4  JUMPER-SMT_3_2-NC_TRACE_SILK  [SMT-JUMPER_3_2-NC_TRACE_SILK]  43.69,117.09 270 bottom
I2C5  JUMPER-SMT_3_2-NC_TRACE_SILK  [SMT-JUMPER_3_2-NC_TRACE_SILK]  95,117.09 270 bottom
J1  MICRO-SD-PUSH-PUSH-EXT-PIN  [MICROSD-EXTERNALPIN]  31.31,17.32 0 bottom
J2  [1X06_NO_SILK]  8.13,27.18 90 top
J3  QWIIC_RIGHT_ANGLE  [JST04_1MM_RA]  52.58,18.29 0 top
J4  [USB-C-16P_4LAYER-PADS]  32.26,19.94 0 top
J5  [1X04_NO_SILK]  8.13,42.42 90 top
J6  Vertical Qwiic Connector  [JST04_1MM_VERT]  54.48,24.64 90 top
J7  [1X09_NO_SILK]  56.39,29.72 90 top
J8  [1X04_NO_SILK]  56.39,19.56 90 top
J9  [JST-2-SMD]  11.94,20.19 180 top
J10  [USB-C-16P_4LAYER-PADS]  83.57,19.94 0 top
J11  [JST-2-SMD]  63.25,20.19 180 top
J12  MICRO-SD-PUSH-PUSH-EXT-PIN  [MICROSD-EXTERNALPIN]  82.61,17.32 0 bottom
J13  Vertical Qwiic Connector  [JST04_1MM_VERT]  105.79,24.64 90 top
J14  [1X04_NO_SILK]  107.7,19.56 90 top
J15  [1X04_NO_SILK]  59.44,42.42 90 top
J16  [1X06_NO_SILK]  59.44,27.18 90 top
J17  QWIIC_RIGHT_ANGLE  [JST04_1MM_RA]  103.89,18.29 0 top
J18  [1X09_NO_SILK]  107.7,29.72 90 top
J19  [USB-C-16P_4LAYER-PADS]  32.26,64.9 0 top
J20  [JST-2-SMD]  11.94,65.15 180 top
J21  MICRO-SD-PUSH-PUSH-EXT-PIN  [MICROSD-EXTERNALPIN]  31.31,62.28 0 bottom
J22  Vertical Qwiic Connector  [JST04_1MM_VERT]  54.48,69.6 90 top
J23  [1X04_NO_SILK]  56.39,64.52 90 top
J24  [1X04_NO_SILK]  8.13,87.38 90 top
J25  [1X06_NO_SILK]  8.13,72.14 90 top
J26  QWIIC_RIGHT_ANGLE  [JST04_1MM_RA]  52.58,63.25 0 top
J27  [1X09_NO_SILK]  56.39,74.68 90 top
J28  [USB-C-16P_4LAYER-PADS]  83.57,64.9 0 top
J29  [JST-2-SMD]  63.25,65.15 180 top
J30  MICRO-SD-PUSH-PUSH-EXT-PIN  [MICROSD-EXTERNALPIN]  82.61,62.28 0 bottom
J31  Vertical Qwiic Connector  [JST04_1MM_VERT]  105.79,69.6 90 top
J32  [1X04_NO_SILK]  107.7,64.52 90 top
J33  [1X04_NO_SILK]  59.44,87.38 90 top
J34  [1X06_NO_SILK]  59.44,72.14 90 top
J35  QWIIC_RIGHT_ANGLE  [JST04_1MM_RA]  103.89,63.25 0 top
J36  [1X09_NO_SILK]  107.7,74.68 90 top
J37  [USB-C-16P_4LAYER-PADS]  32.26,109.86 0 top
J38  [JST-2-SMD]  11.94,110.11 180 top
J39  MICRO-SD-PUSH-PUSH-EXT-PIN  [MICROSD-EXTERNALPIN]  31.31,107.24 0 bottom
J40  Vertical Qwiic Connector  [JST04_1MM_VERT]  54.48,114.55 90 top
J41  [1X04_NO_SILK]  56.39,109.47 90 top
J42  [1X04_NO_SILK]  8.13,132.33 90 top
J43  [1X06_NO_SILK]  8.13,117.09 90 top
J44  QWIIC_RIGHT_ANGLE  [JST04_1MM_RA]  52.58,108.2 0 top
J45  [1X09_NO_SILK]  56.39,119.63 90 top
J46  [USB-C-16P_4LAYER-PADS]  83.57,109.86 0 top
J47  [JST-2-SMD]  63.25,110.11 180 top
J48  MICRO-SD-PUSH-PUSH-EXT-PIN  [MICROSD-EXTERNALPIN]  82.61,107.24 0 bottom
J49  Vertical Qwiic Connector  [JST04_1MM_VERT]  105.79,114.55 90 top
J50  [1X04_NO_SILK]  107.7,109.47 90 top
J51  [1X04_NO_SILK]  59.44,132.33 90 top
J52  [1X06_NO_SILK]  59.44,117.09 90 top
J53  QWIIC_RIGHT_ANGLE  [JST04_1MM_RA]  103.89,108.2 0 top
J54  [1X09_NO_SILK]  107.7,119.63 90 top
LOGO1  SFE_LOGO_NAME.2_INCH  [SFE_LOGO_NAME_.2]  32.26,44.96 0 bottom
LOGO2  SFE_LOGO_FLAME.2_INCH  [SFE_LOGO_FLAME_.2]  51.31,43.69 0 top
LOGO3  QWIIC_LOGO_6MM  [QWIIC_6MM]  103.38,20.07 0 top
LOGO4  QWIIC_LOGO_6MM  [QWIIC_6MM]  52.07,20.07 0 top
LOGO5  SFE_LOGO_NAME.2_INCH  [SFE_LOGO_NAME_.2]  83.57,44.96 0 bottom
LOGO6  SFE_LOGO_FLAME.2_INCH  [SFE_LOGO_FLAME_.2]  102.62,43.69 0 top
LOGO7  QWIIC_LOGO_6MM  [QWIIC_6MM]  52.07,65.02 0 top
LOGO8  SFE_LOGO_NAME.2_INCH  [SFE_LOGO_NAME_.2]  32.26,89.92 0 bottom
LOGO9  SFE_LOGO_FLAME.2_INCH  [SFE_LOGO_FLAME_.2]  51.31,88.65 0 top
LOGO10  QWIIC_LOGO_6MM  [QWIIC_6MM]  103.38,65.02 0 top
LOGO11  SFE_LOGO_NAME.2_INCH  [SFE_LOGO_NAME_.2]  83.57,89.92 0 bottom
LOGO12  SFE_LOGO_FLAME.2_INCH  [SFE_LOGO_FLAME_.2]  102.62,88.65 0 top
LOGO13  QWIIC_LOGO_6MM  [QWIIC_6MM]  52.07,109.98 0 top
LOGO14  SFE_LOGO_NAME.2_INCH  [SFE_LOGO_NAME_.2]  32.26,134.87 0 bottom
LOGO15  SFE_LOGO_FLAME.2_INCH  [SFE_LOGO_FLAME_.2]  51.31,133.6 0 top
LOGO16  QWIIC_LOGO_6MM  [QWIIC_6MM]  103.38,109.98 0 top
LOGO17  SFE_LOGO_NAME.2_INCH  [SFE_LOGO_NAME_.2]  83.57,134.87 0 bottom
LOGO18  SFE_LOGO_FLAME.2_INCH  [SFE_LOGO_FLAME_.2]  102.62,133.6 0 top
MEAS  JUMPER-COMBO_2_NC_TRACE  [COMBO-JUMPER_2_NC_TRACE]  14.48,41.15 270 bottom
MEAS1  JUMPER-COMBO_2_NC_TRACE  [COMBO-JUMPER_2_NC_TRACE]  65.79,41.15 270 bottom
MEAS2  JUMPER-COMBO_2_NC_TRACE  [COMBO-JUMPER_2_NC_TRACE]  14.48,86.11 270 bottom
MEAS3  JUMPER-COMBO_2_NC_TRACE  [COMBO-JUMPER_2_NC_TRACE]  65.79,86.11 270 bottom
MEAS4  JUMPER-COMBO_2_NC_TRACE  [COMBO-JUMPER_2_NC_TRACE]  14.48,131.06 270 bottom
MEAS5  JUMPER-COMBO_2_NC_TRACE  [COMBO-JUMPER_2_NC_TRACE]  65.79,131.06 270 bottom
Q1  [SC70-6]  50.04,48.77 90 top
Q2  [SC70-6]  101.35,48.77 90 top
Q3  [SC70-6]  50.04,93.73 90 top
Q4  [SC70-6]  101.35,93.73 90 top
Q5  [SC70-6]  50.04,138.68 90 top
Q6  [SC70-6]  101.35,138.68 90 top
R1  10k  [0402-TIGHT]  20.19,46.61 0 top
R2  10k  [0402-TIGHT]  41.15,23.5 0 top
R3  10k  [0402-TIGHT]  41.15,24.51 0 top
R4  10k  [0402-TIGHT]  41.15,28.58 0 top
R5  10k  [0402-TIGHT]  41.15,27.05 0 top
R6  10k  [0402-TIGHT]  41.15,26.04 0 top
R7  10k  [0402-TIGHT]  22.1,27.18 270 top
R8  5.1k  [0402-TIGHT]  38.61,19.56 90 top
R9  5.1k  [0402-TIGHT]  25.91,19.56 90 top
R10  10k  [0402-TIGHT]  16.51,48.64 270 top
R11  10k  [0402-TIGHT]  47.5,48.77 180 top
R12  10k  [0402-TIGHT]  52.58,48.77 0 top
R13  1k  [0402-TIGHT]  23.24,19.56 90 top
R14  2.0K  [0402-TIGHT]  11.94,31.88 0 top
R15  2.2k  [0402-TIGHT]  43.81,27.18 180 top
R16  100k  [0402-TIGHT]  21.84,46.1 270 top
R17  9.1K  [0402-TIGHT]  17.53,45.59 180 top
R18  2.2k  [0402-TIGHT]  43.81,28.45 0 top
R19  2.2k  [0402-TIGHT]  24.51,19.56 90 top
R20  5.1k  [0402-TIGHT]  89.92,19.56 90 top
R21  10k  [0402-TIGHT]  92.46,26.04 0 top
R22  10k  [0402-TIGHT]  92.46,27.05 0 top
R23  10k  [0402-TIGHT]  92.46,28.58 0 top
R24  10k  [0402-TIGHT]  92.46,24.51 0 top
R25  10k  [0402-TIGHT]  92.46,23.5 0 top
R26  10k  [0402-TIGHT]  73.41,27.18 270 top
R27  5.1k  [0402-TIGHT]  77.22,19.56 90 top
R28  10k  [0402-TIGHT]  71.5,46.61 0 top
R29  10k  [0402-TIGHT]  98.81,48.77 180 top
R30  10k  [0402-TIGHT]  103.89,48.77 0 top
R31  2.2k  [0402-TIGHT]  75.82,19.56 90 top
R32  2.0K  [0402-TIGHT]  63.25,31.88 0 top
R33  1k  [0402-TIGHT]  74.55,19.56 90 top
R34  2.2k  [0402-TIGHT]  95.12,28.45 0 top
R35  2.2k  [0402-TIGHT]  95.12,27.18 180 top
R36  10k  [0402-TIGHT]  67.82,48.64 270 top
R37  9.1K  [0402-TIGHT]  68.83,45.59 180 top
R38  100k  [0402-TIGHT]  73.15,46.1 270 top
R39  5.1k  [0402-TIGHT]  38.61,64.52 90 top
R40  10k  [0402-TIGHT]  41.15,70.99 0 top
R41  10k  [0402-TIGHT]  41.15,72.01 0 top
R42  10k  [0402-TIGHT]  41.15,73.53 0 top
R43  10k  [0402-TIGHT]  41.15,69.47 0 top
R44  10k  [0402-TIGHT]  41.15,68.45 0 top
R45  10k  [0402-TIGHT]  22.1,72.14 270 top
R46  5.1k  [0402-TIGHT]  25.91,64.52 90 top
R47  10k  [0402-TIGHT]  20.19,91.57 0 top
R48  10k  [0402-TIGHT]  47.5,93.73 180 top
R49  10k  [0402-TIGHT]  52.58,93.73 0 top
R50  2.2k  [0402-TIGHT]  24.51,64.52 90 top
R51  2.0K  [0402-TIGHT]  11.94,76.84 0 top
R52  1k  [0402-TIGHT]  23.24,64.52 90 top
R53  2.2k  [0402-TIGHT]  43.81,73.41 0 top
R54  2.2k  [0402-TIGHT]  43.81,72.14 180 top
R55  10k  [0402-TIGHT]  16.51,93.6 270 top
R56  9.1K  [0402-TIGHT]  17.53,90.55 180 top
R57  100k  [0402-TIGHT]  21.84,91.06 270 top
R58  5.1k  [0402-TIGHT]  89.92,64.52 90 top
R59  10k  [0402-TIGHT]  92.46,70.99 0 top
R60  10k  [0402-TIGHT]  92.46,72.01 0 top
R61  10k  [0402-TIGHT]  92.46,73.53 0 top
R62  10k  [0402-TIGHT]  92.46,69.47 0 top
R63  10k  [0402-TIGHT]  92.46,68.45 0 top
R64  10k  [0402-TIGHT]  73.41,72.14 270 top
R65  5.1k  [0402-TIGHT]  77.22,64.52 90 top
R66  10k  [0402-TIGHT]  71.5,91.57 0 top
R67  10k  [0402-TIGHT]  98.81,93.73 180 top
R68  10k  [0402-TIGHT]  103.89,93.73 0 top
R69  2.2k  [0402-TIGHT]  75.82,64.52 90 top
R70  2.0K  [0402-TIGHT]  63.25,76.84 0 top
R71  1k  [0402-TIGHT]  74.55,64.52 90 top
R72  2.2k  [0402-TIGHT]  95.12,73.41 0 top
R73  2.2k  [0402-TIGHT]  95.12,72.14 180 top
R74  10k  [0402-TIGHT]  67.82,93.6 270 top
R75  9.1K  [0402-TIGHT]  68.83,90.55 180 top
R76  100k  [0402-TIGHT]  73.15,91.06 270 top
R77  5.1k  [0402-TIGHT]  38.61,109.47 90 top
R78  10k  [0402-TIGHT]  41.15,115.95 0 top
R79  10k  [0402-TIGHT]  41.15,116.97 0 top
R80  10k  [0402-TIGHT]  41.15,118.49 0 top
R81  10k  [0402-TIGHT]  41.15,114.43 0 top
R82  10k  [0402-TIGHT]  41.15,113.41 0 top
R83  10k  [0402-TIGHT]  22.1,117.09 270 top
R84  5.1k  [0402-TIGHT]  25.91,109.47 90 top
R85  10k  [0402-TIGHT]  20.19,136.53 0 top
R86  10k  [0402-TIGHT]  47.5,138.68 180 top
R87  10k  [0402-TIGHT]  52.58,138.68 0 top
R88  2.2k  [0402-TIGHT]  24.51,109.47 90 top
R89  2.0K  [0402-TIGHT]  11.94,121.79 0 top
R90  1k  [0402-TIGHT]  23.24,109.47 90 top
R91  2.2k  [0402-TIGHT]  43.81,118.36 0 top
R92  2.2k  [0402-TIGHT]  43.81,117.09 180 top
R93  10k  [0402-TIGHT]  16.51,138.56 270 top
R94  9.1K  [0402-TIGHT]  17.53,135.51 180 top
R95  100k  [0402-TIGHT]  21.84,136.02 270 top
R96  5.1k  [0402-TIGHT]  89.92,109.47 90 top
R97  10k  [0402-TIGHT]  92.46,115.95 0 top
R98  10k  [0402-TIGHT]  92.46,116.97 0 top
R99  10k  [0402-TIGHT]  92.46,118.49 0 top
R100  10k  [0402-TIGHT]  92.46,114.43 0 top
R101  10k  [0402-TIGHT]  92.46,113.41 0 top
R102  10k  [0402-TIGHT]  73.41,117.09 270 top
R103  5.1k  [0402-TIGHT]  77.22,109.47 90 top
R104  10k  [0402-TIGHT]  71.5,136.53 0 top
R105  10k  [0402-TIGHT]  98.81,138.68 180 top
R106  10k  [0402-TIGHT]  103.89,138.68 0 top
R107  2.2k  [0402-TIGHT]  75.82,109.47 90 top
R108  2.0K  [0402-TIGHT]  63.25,121.79 0 top
R109  1k  [0402-TIGHT]  74.55,109.47 90 top
R110  2.2k  [0402-TIGHT]  95.12,118.36 0 top
R111  2.2k  [0402-TIGHT]  95.12,117.09 180 top
R112  10k  [0402-TIGHT]  67.82,138.56 270 top
R113  9.1K  [0402-TIGHT]  68.83,135.51 180 top
R114  100k  [0402-TIGHT]  73.15,136.02 270 top
RGB  JUMPER-SMT_2_NC_TRACE_SILK  [SMT-JUMPER_2_NC_TRACE_SILK]  46.23,15.11 90 bottom
RGB1  JUMPER-SMT_2_NC_TRACE_SILK  [SMT-JUMPER_2_NC_TRACE_SILK]  97.54,15.11 90 bottom
RGB2  JUMPER-SMT_2_NC_TRACE_SILK  [SMT-JUMPER_2_NC_TRACE_SILK]  46.23,60.07 90 bottom
RGB3  JUMPER-SMT_2_NC_TRACE_SILK  [SMT-JUMPER_2_NC_TRACE_SILK]  97.54,60.07 90 bottom
RGB4  JUMPER-SMT_2_NC_TRACE_SILK  [SMT-JUMPER_2_NC_TRACE_SILK]  46.23,105.03 90 bottom
RGB5  JUMPER-SMT_2_NC_TRACE_SILK  [SMT-JUMPER_2_NC_TRACE_SILK]  97.54,105.03 90 bottom
S1  RESET  [TACTILE_SWITCH_SMD_RIGHT_ANGLE]  23.37,14.99 0 top
S2  BOOT  [TACTILE_SWITCH_SMD_RIGHT_ANGLE]  41.15,14.99 0 top
S3  RESET  [TACTILE_SWITCH_SMD_RIGHT_ANGLE]  74.68,14.99 0 top
S4  BOOT  [TACTILE_SWITCH_SMD_RIGHT_ANGLE]  92.46,14.99 0 top
S5  RESET  [TACTILE_SWITCH_SMD_RIGHT_ANGLE]  23.37,59.94 0 top
S6  BOOT  [TACTILE_SWITCH_SMD_RIGHT_ANGLE]  41.15,59.94 0 top
S7  RESET  [TACTILE_SWITCH_SMD_RIGHT_ANGLE]  74.68,59.94 0 top
S8  BOOT  [TACTILE_SWITCH_SMD_RIGHT_ANGLE]  92.46,59.94 0 top
S9  RESET  [TACTILE_SWITCH_SMD_RIGHT_ANGLE]  23.37,104.9 0 top
S10  BOOT  [TACTILE_SWITCH_SMD_RIGHT_ANGLE]  41.15,104.9 0 top
S11  RESET  [TACTILE_SWITCH_SMD_RIGHT_ANGLE]  74.68,104.9 0 top
S12  BOOT  [TACTILE_SWITCH_SMD_RIGHT_ANGLE]  92.46,104.9 0 top
SHLD  JUMPER-SMT_2_NC_TRACE_SILK  [SMT-JUMPER_2_NC_TRACE_SILK]  41.02,19.05 90 bottom
SHLD1  JUMPER-SMT_2_NC_TRACE_SILK  [SMT-JUMPER_2_NC_TRACE_SILK]  92.33,19.05 90 bottom
SHLD2  JUMPER-SMT_2_NC_TRACE_SILK  [SMT-JUMPER_2_NC_TRACE_SILK]  41.02,64.01 90 bottom
SHLD3  JUMPER-SMT_2_NC_TRACE_SILK  [SMT-JUMPER_2_NC_TRACE_SILK]  92.33,64.01 90 bottom
SHLD4  JUMPER-SMT_2_NC_TRACE_SILK  [SMT-JUMPER_2_NC_TRACE_SILK]  41.02,108.97 90 bottom
SHLD5  JUMPER-SMT_2_NC_TRACE_SILK  [SMT-JUMPER_2_NC_TRACE_SILK]  92.33,108.97 90 bottom
STAT  JUMPER-SMT_2_NC_TRACE_SILK  [SMT-JUMPER_2_NC_TRACE_SILK]  19.68,15.11 270 bottom
STAT1  JUMPER-SMT_2_NC_TRACE_SILK  [SMT-JUMPER_2_NC_TRACE_SILK]  70.99,15.11 270 bottom
STAT2  JUMPER-SMT_2_NC_TRACE_SILK  [SMT-JUMPER_2_NC_TRACE_SILK]  19.68,60.07 270 bottom
STAT3  JUMPER-SMT_2_NC_TRACE_SILK  [SMT-JUMPER_2_NC_TRACE_SILK]  70.99,60.07 270 bottom
STAT4  JUMPER-SMT_2_NC_TRACE_SILK  [SMT-JUMPER_2_NC_TRACE_SILK]  19.68,105.03 270 bottom
STAT5  JUMPER-SMT_2_NC_TRACE_SILK  [SMT-JUMPER_2_NC_TRACE_SILK]  70.99,105.03 270 bottom
TP1  TEST-POINT3X5  [PAD.03X.05]  43.69,15.75 180 bottom
TP2  TEST-POINT3X5  [PAD.03X.05]  15.75,36.07 0 bottom
TP3  TEST-POINT3X5  [PAD.03X.05]  14.48,18.29 0 bottom
TP4  TEST-POINT3X5  [PAD.03X.05]  19.56,28.45 0 bottom
TP5  TEST-POINT3X5  [PAD.03X.05]  95,15.75 180 bottom
TP6  TEST-POINT3X5  [PAD.03X.05]  70.87,28.45 0 bottom
TP7  TEST-POINT3X5  [PAD.03X.05]  67.06,36.07 0 bottom
TP8  TEST-POINT3X5  [PAD.03X.05]  65.79,18.29 0 bottom
TP9  TEST-POINT3X5  [PAD.03X.05]  43.69,60.71 180 bottom
TP10  TEST-POINT3X5  [PAD.03X.05]  19.56,73.41 0 bottom
TP11  TEST-POINT3X5  [PAD.03X.05]  15.75,81.03 0 bottom
TP12  TEST-POINT3X5  [PAD.03X.05]  14.48,63.25 0 bottom
TP13  TEST-POINT3X5  [PAD.03X.05]  95,60.71 180 bottom
TP14  TEST-POINT3X5  [PAD.03X.05]  70.87,73.41 0 bottom
TP15  TEST-POINT3X5  [PAD.03X.05]  67.06,81.03 0 bottom
TP16  TEST-POINT3X5  [PAD.03X.05]  65.79,63.25 0 bottom
TP17  TEST-POINT3X5  [PAD.03X.05]  43.69,105.66 180 bottom
TP18  TEST-POINT3X5  [PAD.03X.05]  19.56,118.36 0 bottom
TP19  TEST-POINT3X5  [PAD.03X.05]  15.75,125.98 0 bottom
TP20  TEST-POINT3X5  [PAD.03X.05]  14.48,108.2 0 bottom
TP21  TEST-POINT3X5  [PAD.03X.05]  95,105.66 180 bottom
TP22  TEST-POINT3X5  [PAD.03X.05]  70.87,118.36 0 bottom
TP23  TEST-POINT3X5  [PAD.03X.05]  67.06,125.98 0 bottom
TP24  TEST-POINT3X5  [PAD.03X.05]  65.79,108.2 0 bottom
U1  ESP-WROOM-32E  [ESP-WROOM-32D-NARROW]  32.26,41.15 90 top
U2  74HC4066_QUAD_BILATERAL_SWITCH_QFN  [14-QFN]  19.56,28.45 270 top
U3  XC6222B331MR-G  [SOT23-5]  19.56,34.8 270 top
U4  CH340C  [SO016]  32.26,24.64 0 top
U5  MCP73831  [SOT23-5]  14.86,29.08 0 top
U6  74HC4066_QUAD_BILATERAL_SWITCH_QFN  [14-QFN]  47.5,27.18 0 top
U7  MAX17048  [DFN-8]  11.81,29.08 0 top
U8  XC6222B331MR-G  [SOT23-5]  48.13,34.8 90 top
U9  74HC4066_QUAD_BILATERAL_SWITCH_QFN  [14-QFN]  70.87,28.45 270 top
U10  ESP-WROOM-32E  [ESP-WROOM-32D-NARROW]  83.57,41.15 90 top
U11  CH340C  [SO016]  83.57,24.64 0 top
U12  XC6222B331MR-G  [SOT23-5]  99.44,34.8 90 top
U13  MAX17048  [DFN-8]  63.12,29.08 0 top
U14  MCP73831  [SOT23-5]  66.17,29.08 0 top
U15  XC6222B331MR-G  [SOT23-5]  70.87,34.8 270 top
U16  74HC4066_QUAD_BILATERAL_SWITCH_QFN  [14-QFN]  98.81,27.18 0 top
U17  74HC4066_QUAD_BILATERAL_SWITCH_QFN  [14-QFN]  19.56,73.41 270 top
U18  ESP-WROOM-32E  [ESP-WROOM-32D-NARROW]  32.26,86.11 90 top
U19  CH340C  [SO016]  32.26,69.6 0 top
U20  XC6222B331MR-G  [SOT23-5]  48.13,79.76 90 top
U21  MAX17048  [DFN-8]  11.81,74.04 0 top
U22  MCP73831  [SOT23-5]  14.86,74.04 0 top
U23  XC6222B331MR-G  [SOT23-5]  19.56,79.76 270 top
U24  74HC4066_QUAD_BILATERAL_SWITCH_QFN  [14-QFN]  47.5,72.14 0 top
U25  74HC4066_QUAD_BILATERAL_SWITCH_QFN  [14-QFN]  70.87,73.41 270 top
U26  ESP-WROOM-32E  [ESP-WROOM-32D-NARROW]  83.57,86.11 90 top
U27  CH340C  [SO016]  83.57,69.6 0 top
U28  XC6222B331MR-G  [SOT23-5]  99.44,79.76 90 top
U29  MAX17048  [DFN-8]  63.12,74.04 0 top
U30  MCP73831  [SOT23-5]  66.17,74.04 0 top
U31  XC6222B331MR-G  [SOT23-5]  70.87,79.76 270 top
U32  74HC4066_QUAD_BILATERAL_SWITCH_QFN  [14-QFN]  98.81,72.14 0 top
U33  74HC4066_QUAD_BILATERAL_SWITCH_QFN  [14-QFN]  19.56,118.36 270 top
U34  ESP-WROOM-32E  [ESP-WROOM-32D-NARROW]  32.26,131.06 90 top
U35  CH340C  [SO016]  32.26,114.55 0 top
U36  XC6222B331MR-G  [SOT23-5]  48.13,124.71 90 top
U37  MAX17048  [DFN-8]  11.81,119 0 top
U38  MCP73831  [SOT23-5]  14.86,119 0 top
U39  XC6222B331MR-G  [SOT23-5]  19.56,124.71 270 top
U40  74HC4066_QUAD_BILATERAL_SWITCH_QFN  [14-QFN]  47.5,117.09 0 top
U41  74HC4066_QUAD_BILATERAL_SWITCH_QFN  [14-QFN]  70.87,118.36 270 top
U42  ESP-WROOM-32E  [ESP-WROOM-32D-NARROW]  83.57,131.06 90 top
U43  CH340C  [SO016]  83.57,114.55 0 top
U44  XC6222B331MR-G  [SOT23-5]  99.44,124.71 90 top
U45  MAX17048  [DFN-8]  63.12,119 0 top
U46  MCP73831  [SOT23-5]  66.17,119 0 top
U47  XC6222B331MR-G  [SOT23-5]  70.87,124.71 270 top
U48  74HC4066_QUAD_BILATERAL_SWITCH_QFN  [14-QFN]  98.81,117.09 0 top
U$1  [DATALOGGER_IOT5]  32.26,35.81 0 bottom
U$2  [RESET0]  23.37,17.27 0 top
U$3  [STAT0]  19.56,18.54 90 top
U$4  [CHG0]  17.65,18.03 90 top
U$5  [#STAT_#0]  22.96,14.99 0 bottom
U$6  [#RGB#0]  46.15,16.92 0 bottom
U$7  [0_#_BOOT0]  41.15,17.27 0 top
U$8  [#_CHG#0]  17.65,18.03 90 bottom
U$9  [#MEAS#0]  14.48,44.2 0 top
U$10  [#MEAS#0]  16,41.15 90 bottom
U$11  [RGB0]  46.74,15.75 0 top
U$12  [#5#0]  55.63,39.88 0 bottom
U$13  [SFE_LOGO_FLAME_STOP_.1]  8.64,18.54 0 bottom
U$14  [DATALOGGER_IOT2]  49.02,38.86 0 top
U$15  [RESET0]  74.68,17.27 0 top
U$16  [##RESET##0]  55.63,50.04 0 bottom
U$17  [#0_#_#BOOT##0]  55.63,47.5 0 bottom
U$18  [#36_#_A0#0]  55.63,44.96 0 bottom
U$19  [#39_#_A3#0]  55.63,42.42 0 bottom
U$20  [STAT0]  70.87,18.54 90 top
U$21  [#17_#_TXD#0]  55.63,37.34 0 bottom
U$22  [#16_#_RXD#0]  55.63,34.8 0 bottom
U$23  [#25#0]  55.63,32.26 0 bottom
U$24  [#26#0]  55.63,29.72 0 bottom
U$25  [#SCL#0]  55.63,27.18 0 bottom
U$26  [#SDA#0]  55.63,24.64 0 bottom
U$27  [#3V3_SW#0]  55.63,22.1 0 bottom
U$28  [#GND#0]  55.63,19.56 0 bottom
U$29  [#GND#1]  8.89,29.72 0 bottom
U$30  [#GND#1]  8.89,34.8 0 bottom
U$31  [#GND#1]  8.89,39.88 0 bottom
U$32  [#BATT#0]  8.89,27.18 0 bottom
U$33  [#5V#0]  8.89,32.26 0 bottom
U$34  [#3V3#0]  8.89,37.34 0 bottom
U$35  [#33#0]  8.89,42.42 0 bottom
U$36  [#POCI_#_19#0]  8.89,44.96 0 bottom
U$37  [#PICO_#_23#0]  8.89,47.5 0 bottom
U$38  [#SCK_#_18#0]  8.89,50.04 0 bottom
U$39  [CHG0]  68.96,18.03 90 top
U$40  [##RESET##0]  106.93,50.04 0 bottom
U$41  [#0_#_#BOOT##0]  106.93,47.5 0 bottom
U$42  [#36_#_A0#0]  106.93,44.96 0 bottom
U$43  [#39_#_A3#0]  106.93,42.42 0 bottom
U$44  [#17_#_TXD#0]  106.93,37.34 0 bottom
U$45  [#SHLD#0]  41.66,19.05 0 bottom
U$46  [#I�C#0]  43.69,24.7 0 bottom
U$47  [STAT_LED0]  50.04,31.62 0 bottom
U$48  [RGB_LED0]  50.04,30.35 0 bottom
U$49  [#16_#_RXD#0]  106.93,34.8 0 bottom
U$50  [#25#0]  106.93,32.26 0 bottom
U$51  [#26#0]  106.93,29.72 0 bottom
U$52  [#SCL#0]  106.93,27.18 0 bottom
U$53  [#SDA#0]  106.93,24.64 0 bottom
U$54  [#3V3_SW#0]  106.93,22.1 0 bottom
U$55  [#GND#0]  106.93,19.56 0 bottom
U$56  [#GND#1]  60.2,29.72 0 bottom
U$57  [#GND#1]  60.2,34.8 0 bottom
U$58  [#GND#1]  60.2,39.88 0 bottom
U$59  [#BATT#0]  60.2,27.18 0 bottom
U$60  [#5V#0]  60.2,32.26 0 bottom
U$61  [#3V3#0]  60.2,37.34 0 bottom
U$62  [#33#0]  60.2,42.42 0 bottom
U$63  [#POCI_#_19#0]  60.2,44.96 0 bottom
U$64  [#PICO_#_23#0]  60.2,47.5 0 bottom
U$65  [#SCK_#_18#0]  60.2,50.04 0 bottom
U$66  [#SHLD#0]  92.96,19.05 0 bottom
U$67  [#I�C#0]  95,24.7 0 bottom
U$68  [STAT_LED0]  101.35,31.62 0 bottom
U$69  [RGB_LED0]  101.35,30.35 0 bottom
U$70  [0_#_BOOT0]  92.46,17.27 0 top
U$71  [#_CHG#0]  68.96,18.03 90 bottom
U$72  [#STAT_#0]  74.27,14.99 0 bottom
U$73  [#RGB#0]  97.46,16.92 0 bottom
U$74  [#MEAS#0]  65.79,44.2 0 top
U$75  [#MEAS#0]  67.31,41.15 90 bottom
U$76  [RGB0]  98.04,15.75 0 top
U$77  [SFE_LOGO_FLAME_STOP_.1]  59.94,18.54 0 bottom
U$78  [DATALOGGER_IOT2]  100.33,38.86 0 top
U$79  [DATALOGGER_IOT5]  83.57,35.81 0 bottom
U$80  [#5#0]  106.93,39.88 0 bottom
U$81  [RESET0]  23.37,62.23 0 top
U$82  [STAT0]  19.56,63.5 90 top
U$83  [CHG0]  17.65,62.99 90 top
U$84  [##RESET##0]  55.63,95 0 bottom
U$85  [#0_#_#BOOT##0]  55.63,92.46 0 bottom
U$86  [#36_#_A0#0]  55.63,89.92 0 bottom
U$87  [#39_#_A3#0]  55.63,87.38 0 bottom
U$88  [#17_#_TXD#0]  55.63,82.3 0 bottom
U$89  [#16_#_RXD#0]  55.63,79.76 0 bottom
U$90  [#25#0]  55.63,77.22 0 bottom
U$91  [#26#0]  55.63,74.68 0 bottom
U$92  [#SCL#0]  55.63,72.14 0 bottom
U$93  [#SDA#0]  55.63,69.6 0 bottom
U$94  [#3V3_SW#0]  55.63,67.06 0 bottom
U$95  [#GND#0]  55.63,64.52 0 bottom
U$96  [#GND#1]  8.89,74.68 0 bottom
U$97  [#GND#1]  8.89,79.76 0 bottom
U$98  [#GND#1]  8.89,84.84 0 bottom
U$99  [#BATT#0]  8.89,72.14 0 bottom
U$100  [#5V#0]  8.89,77.22 0 bottom
U$101  [#3V3#0]  8.89,82.3 0 bottom
U$102  [#33#0]  8.89,87.38 0 bottom
U$103  [#POCI_#_19#0]  8.89,89.92 0 bottom
U$104  [#PICO_#_23#0]  8.89,92.46 0 bottom
U$105  [#SCK_#_18#0]  8.89,95 0 bottom
U$106  [#SHLD#0]  41.66,64.01 0 bottom
U$107  [#I�C#0]  43.69,69.66 0 bottom
U$108  [STAT_LED0]  50.04,76.58 0 bottom
U$109  [RGB_LED0]  50.04,75.31 0 bottom
U$110  [0_#_BOOT0]  41.15,62.23 0 top
U$111  [#_CHG#0]  17.65,62.99 90 bottom
U$112  [#STAT_#0]  22.96,59.94 0 bottom
U$113  [#RGB#0]  46.15,61.87 0 bottom
U$114  [#MEAS#0]  14.48,89.15 0 top
U$115  [#MEAS#0]  16,86.11 90 bottom
U$116  [RGB0]  46.74,60.71 0 top
U$117  [SFE_LOGO_FLAME_STOP_.1]  8.64,63.5 0 bottom
U$118  [DATALOGGER_IOT2]  49.02,83.82 0 top
U$119  [DATALOGGER_IOT5]  32.26,80.77 0 bottom
U$120  [#5#0]  55.63,84.84 0 bottom
U$121  [RESET0]  74.68,62.23 0 top
U$122  [STAT0]  70.87,63.5 90 top
U$123  [CHG0]  68.96,62.99 90 top
U$124  [##RESET##0]  106.93,95 0 bottom
U$125  [#0_#_#BOOT##0]  106.93,92.46 0 bottom
U$126  [#36_#_A0#0]  106.93,89.92 0 bottom
U$127  [#39_#_A3#0]  106.93,87.38 0 bottom
U$128  [#17_#_TXD#0]  106.93,82.3 0 bottom
U$129  [#16_#_RXD#0]  106.93,79.76 0 bottom
U$130  [#25#0]  106.93,77.22 0 bottom
U$131  [#26#0]  106.93,74.68 0 bottom
U$132  [#SCL#0]  106.93,72.14 0 bottom
U$133  [#SDA#0]  106.93,69.6 0 bottom
U$134  [#3V3_SW#0]  106.93,67.06 0 bottom
U$135  [#GND#0]  106.93,64.52 0 bottom
U$136  [#GND#1]  60.2,74.68 0 bottom
U$137  [#GND#1]  60.2,79.76 0 bottom
U$138  [#GND#1]  60.2,84.84 0 bottom
U$139  [#BATT#0]  60.2,72.14 0 bottom
U$140  [#5V#0]  60.2,77.22 0 bottom
U$141  [#3V3#0]  60.2,82.3 0 bottom
U$142  [#33#0]  60.2,87.38 0 bottom
U$143  [#POCI_#_19#0]  60.2,89.92 0 bottom
U$144  [#PICO_#_23#0]  60.2,92.46 0 bottom
U$145  [#SCK_#_18#0]  60.2,95 0 bottom
U$146  [#SHLD#0]  92.96,64.01 0 bottom
U$147  [#I�C#0]  95,69.66 0 bottom
U$148  [STAT_LED0]  101.35,76.58 0 bottom
U$149  [RGB_LED0]  101.35,75.31 0 bottom
U$150  [0_#_BOOT0]  92.46,62.23 0 top
U$151  [#_CHG#0]  68.96,62.99 90 bottom
U$152  [#STAT_#0]  74.27,59.94 0 bottom
U$153  [#RGB#0]  97.46,61.87 0 bottom
U$154  [#MEAS#0]  65.79,89.15 0 top
U$155  [#MEAS#0]  67.31,86.11 90 bottom
U$156  [RGB0]  98.04,60.71 0 top
U$157  [SFE_LOGO_FLAME_STOP_.1]  59.94,63.5 0 bottom
U$158  [DATALOGGER_IOT2]  100.33,83.82 0 top
U$159  [DATALOGGER_IOT5]  83.57,80.77 0 bottom
U$160  [#5#0]  106.93,84.84 0 bottom
U$161  [RESET0]  23.37,107.19 0 top
U$162  [STAT0]  19.56,108.46 90 top
U$163  [CHG0]  17.65,107.95 90 top
U$164  [##RESET##0]  55.63,139.95 0 bottom
U$165  [#0_#_#BOOT##0]  55.63,137.41 0 bottom
U$166  [#36_#_A0#0]  55.63,134.87 0 bottom
U$167  [#39_#_A3#0]  55.63,132.33 0 bottom
U$168  [#17_#_TXD#0]  55.63,127.25 0 bottom
U$169  [#16_#_RXD#0]  55.63,124.71 0 bottom
U$170  [#25#0]  55.63,122.17 0 bottom
U$171  [#26#0]  55.63,119.63 0 bottom
U$172  [#SCL#0]  55.63,117.09 0 bottom
U$173  [#SDA#0]  55.63,114.55 0 bottom
U$174  [#3V3_SW#0]  55.63,112.01 0 bottom
U$175  [#GND#0]  55.63,109.47 0 bottom
U$176  [#GND#1]  8.89,119.63 0 bottom
U$177  [#GND#1]  8.89,124.71 0 bottom
U$178  [#GND#1]  8.89,129.79 0 bottom
U$179  [#BATT#0]  8.89,117.09 0 bottom
U$180  [#5V#0]  8.89,122.17 0 bottom
U$181  [#3V3#0]  8.89,127.25 0 bottom
U$182  [#33#0]  8.89,132.33 0 bottom
U$183  [#POCI_#_19#0]  8.89,134.87 0 bottom
U$184  [#PICO_#_23#0]  8.89,137.41 0 bottom
U$185  [#SCK_#_18#0]  8.89,139.95 0 bottom
U$186  [#SHLD#0]  41.66,108.97 0 bottom
U$187  [#I�C#0]  43.69,114.62 0 bottom
U$188  [STAT_LED0]  50.04,121.54 0 bottom
U$189  [RGB_LED0]  50.04,120.27 0 bottom
U$190  [0_#_BOOT0]  41.15,107.19 0 top
U$191  [#_CHG#0]  17.65,107.95 90 bottom
U$192  [#STAT_#0]  22.96,104.9 0 bottom
U$193  [#RGB#0]  46.15,106.83 0 bottom
U$194  [#MEAS#0]  14.48,134.11 0 top
U$195  [#MEAS#0]  16,131.06 90 bottom
U$196  [RGB0]  46.74,105.66 0 top
U$197  [SFE_LOGO_FLAME_STOP_.1]  8.64,108.46 0 bottom
U$198  [DATALOGGER_IOT2]  49.02,128.78 0 top
U$199  [DATALOGGER_IOT5]  32.26,125.73 0 bottom
U$200  [#5#0]  55.63,129.79 0 bottom
U$201  [RESET0]  74.68,107.19 0 top
U$202  [STAT0]  70.87,108.46 90 top
U$203  [CHG0]  68.96,107.95 90 top
U$204  [##RESET##0]  106.93,139.95 0 bottom
U$205  [#0_#_#BOOT##0]  106.93,137.41 0 bottom
U$206  [#36_#_A0#0]  106.93,134.87 0 bottom
U$207  [#39_#_A3#0]  106.93,132.33 0 bottom
U$208  [#17_#_TXD#0]  106.93,127.25 0 bottom
U$209  [#16_#_RXD#0]  106.93,124.71 0 bottom
U$210  [#25#0]  106.93,122.17 0 bottom
U$211  [#26#0]  106.93,119.63 0 bottom
U$212  [#SCL#0]  106.93,117.09 0 bottom
U$213  [#SDA#0]  106.93,114.55 0 bottom
U$214  [#3V3_SW#0]  106.93,112.01 0 bottom
U$215  [#GND#0]  106.93,109.47 0 bottom
U$216  [#GND#1]  60.2,119.63 0 bottom
U$217  [#GND#1]  60.2,124.71 0 bottom
U$218  [#GND#1]  60.2,129.79 0 bottom
U$219  [#BATT#0]  60.2,117.09 0 bottom
U$220  [#5V#0]  60.2,122.17 0 bottom
U$221  [#3V3#0]  60.2,127.25 0 bottom
U$222  [#33#0]  60.2,132.33 0 bottom
U$223  [#POCI_#_19#0]  60.2,134.87 0 bottom
U$224  [#PICO_#_23#0]  60.2,137.41 0 bottom
U$225  [#SCK_#_18#0]  60.2,139.95 0 bottom
U$226  [#SHLD#0]  92.96,108.97 0 bottom
U$227  [#I�C#0]  95,114.62 0 bottom
U$228  [STAT_LED0]  101.35,121.54 0 bottom
U$229  [RGB_LED0]  101.35,120.27 0 bottom
U$230  [0_#_BOOT0]  92.46,107.19 0 top
U$231  [#_CHG#0]  68.96,107.95 90 bottom
U$232  [#STAT_#0]  74.27,104.9 0 bottom
U$233  [#RGB#0]  97.46,106.83 0 bottom
U$234  [#MEAS#0]  65.79,134.11 0 top
U$235  [#MEAS#0]  67.31,131.06 90 bottom
U$236  [RGB0]  98.04,105.66 0 top
U$237  [SFE_LOGO_FLAME_STOP_.1]  59.94,108.46 0 bottom
U$238  [DATALOGGER_IOT2]  100.33,128.78 0 top
U$239  [DATALOGGER_IOT5]  83.57,125.73 0 bottom
U$240  [#5#0]  106.93,129.79 0 bottom

## Library data of the parts
C1 C3 C4 C6 C8 C9 C11 C13 C15-C22 C24-C26 C28-C31 C33 C35 C37 C40 C41 C43 C44 C46-C53 C55-C58 C60 C62 C64 C67 C68 C70 C71 C73-C80 C82-C85 C87 C89 C91 C94 C95 C97 C98 C100-C107 C109-C112 C114 C116 C118 C121 C122 C124 C125 C127-C134 C136-C139 C141 C143 C145 C148 C149 C151 C152 C154-C161 = SparkFun-Capacitors; PROD_ID: CAP-14232
C2 C5 C7 C10 C14 C23 C27 C32 C34 C36 C38 C39 C45 C54 C59 C61 C63 C65 C66 C72 C81 C86 C88 C90 C92 C93 C99 C108 C113 C115 C117 C119 C120 C126 C135 C140 C142 C144 C146 C147 C153 C162 = SparkFun-Capacitors; PROD_ID: CAP-14993
C12 C42 C69 C96 C123 C150 = SparkFun-Capacitors; PROD_ID: CAP-16508
CHG CHG1-CHG5 I2C I2C1-I2C5 MEAS MEAS1-MEAS5 RGB RGB1-RGB5 SHLD SHLD1-SHLD5 STAT STAT1-STAT5 = SparkFun-Jumpers
D1-D3 D11-D13 D18-D20 D25-D27 D32-D34 D39-D41 = SparkFun-DiscreteSemi; PROD_ID: DIO-14072
D4 D14 D21 D28 D35 D42 = SparkFun-DiscreteSemi; PROD_ID: DIO-14502
D5 D10 D17 D24 D31 D38 = SparkFun-LED; PROD_ID: DIO-09003
D6 D9 D16 D23 D30 D37 = RA_RGB; PROD_ID: DIO-18471
D7 D8 D15 D22 D29 D36 = SparkFun-LED; PROD_ID: DIO-08575
E$1-E$4 FD1-FD24 LOGO1-LOGO18 U$13 U$77 U$117 U$157 U$197 U$237 = SparkFun-Aesthetics
E$5 E$6 = SparkFun-Retired
H1-H24 = SparkFun-Hardware
J1 J12 J21 J30 J39 J48 = SparkFun-Connectors; PROD_ID: CONN-16110
J2 J5 J7 J8 J14-J16 J18 J23-J25 J27 J32-J34 J36 J41-J43 J45 J50-J52 J54 TP1-TP24 = SparkFun-Connectors
J3 J17 J26 J35 J44 J53 = SparkFun-Connectors; PROD_ID: CONN-13694
J4 J10 J19 J28 J37 J46 = SparkFun-Connectors; PROD_ID: CONN-14122
J6 J13 J22 J31 J40 J49 = SparkFun-Connectors; PROD_ID: CONN-14483
J9 J11 J20 J29 J38 J47 = SparkFun-Connectors; PROD_ID: CONN-11443; SF_ID: PRT-08612
Q1-Q6 = SparkFun-DiscreteSemi; PROD_ID: TRANS-13337
R1-R7 R10-R12 R21-R26 R28-R30 R36 R40-R45 R47-R49 R55 R59-R64 R66-R68 R74 R78-R83 R85-R87 R93 R97-R102 R104-R106 R112 = SparkFun-Resistors; PROD_ID: RES-14241
R8 R9 R20 R27 R39 R46 R58 R65 R77 R84 R96 R103 = SparkFun-Resistors; PROD_ID: RES-14340
R13 R33 R52 R71 R90 R109 = SparkFun-Resistors; PROD_ID: RES-14342
R14 R32 R51 R70 R89 R108 = SparkFun-Resistors; PROD_ID: RES-15406
R15 R18 R19 R31 R34 R35 R50 R53 R54 R69 R72 R73 R88 R91 R92 R107 R110 R111 = SparkFun-Resistors; PROD_ID: RES-14341
R16 R38 R57 R76 R95 R114 = SparkFun-Resistors; PROD_ID: RES-13495
R17 R37 R56 R75 R94 R113 = RA_RGB; PN: RC0402FR-079K1L; PROD_ID: RES-18504
S1-S12 = SparkFun-Switches; PROD_ID: COMP-12265
U1 U10 U18 U26 U34 U42 = SparkFun-RF; PROD_ID: IC-15676
U2 U6 U9 U16 U17 U24 U25 U32 U33 U40 U41 U48 = SparkFun-IC-Logic; PROD_ID: IC-16528
U3 U8 U12 U15 U20 U23 U28 U31 U36 U39 U44 U47 = SparkFun-IC-Power; IOUT: 700mA; PROD_ID: VREG-16775; VOUT: 3.3V
U4 U11 U19 U27 U35 U43 = SparkFun-IC-Comms; PROD_ID: IC-14038
U5 U14 U22 U30 U38 U46 = SparkFun-IC-Power; PROD_ID: IC-09995
U7 U13 U21 U29 U37 U45 = SparkFun-IC-Power; PROD_ID: IC-12551
U$1-U$12 U$14-U$76 U$78-U$116 U$118-U$156 U$158-U$196 U$198-U$236 U$238-U$240 = output